# Allegro board AGET_ERNI2HRS.brd
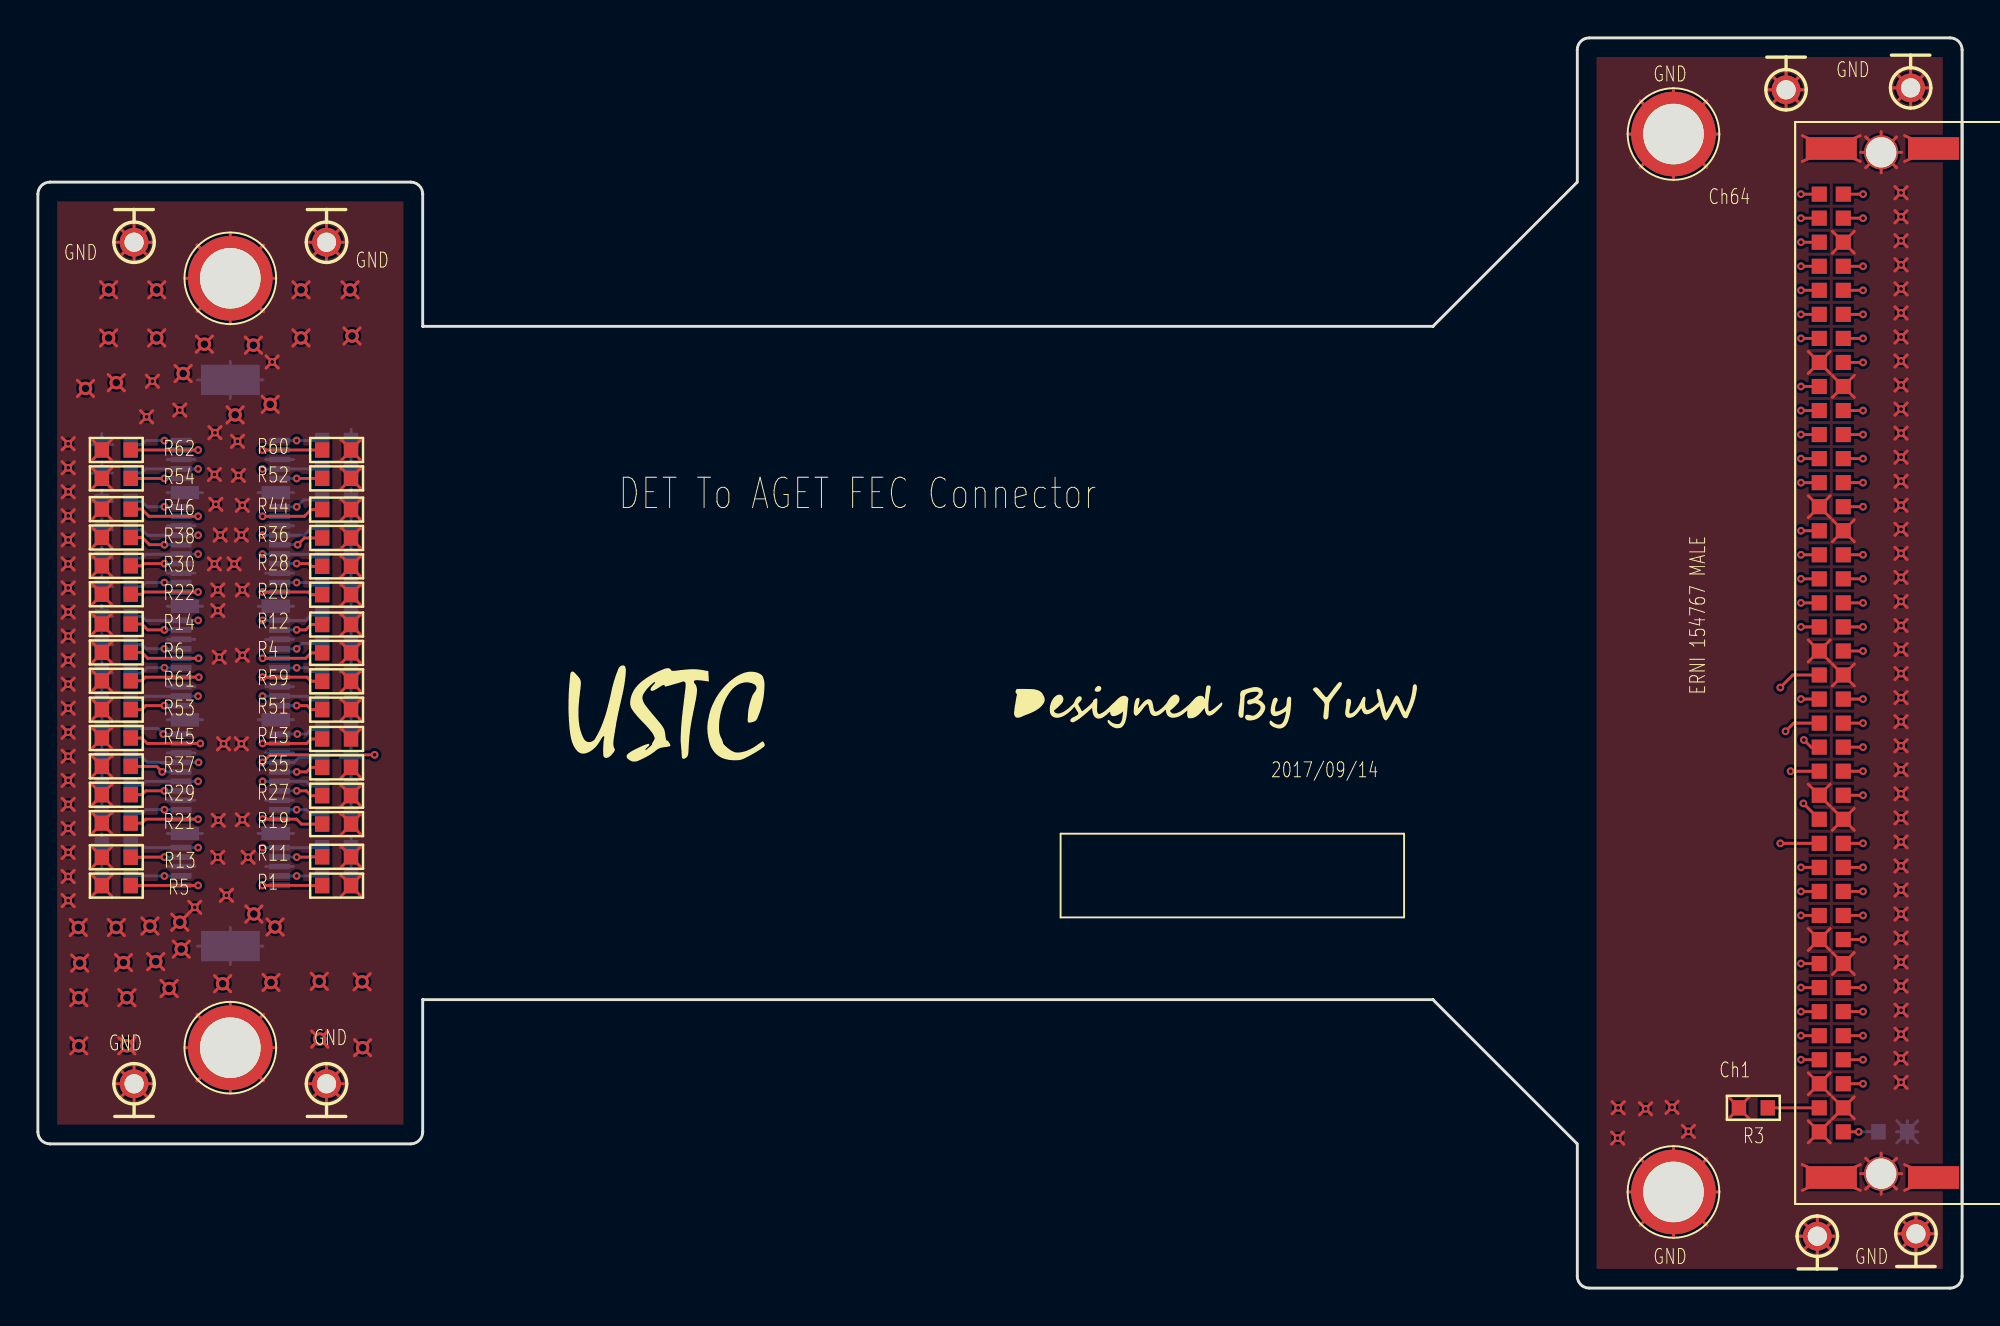
[diagram p0: board, top side]
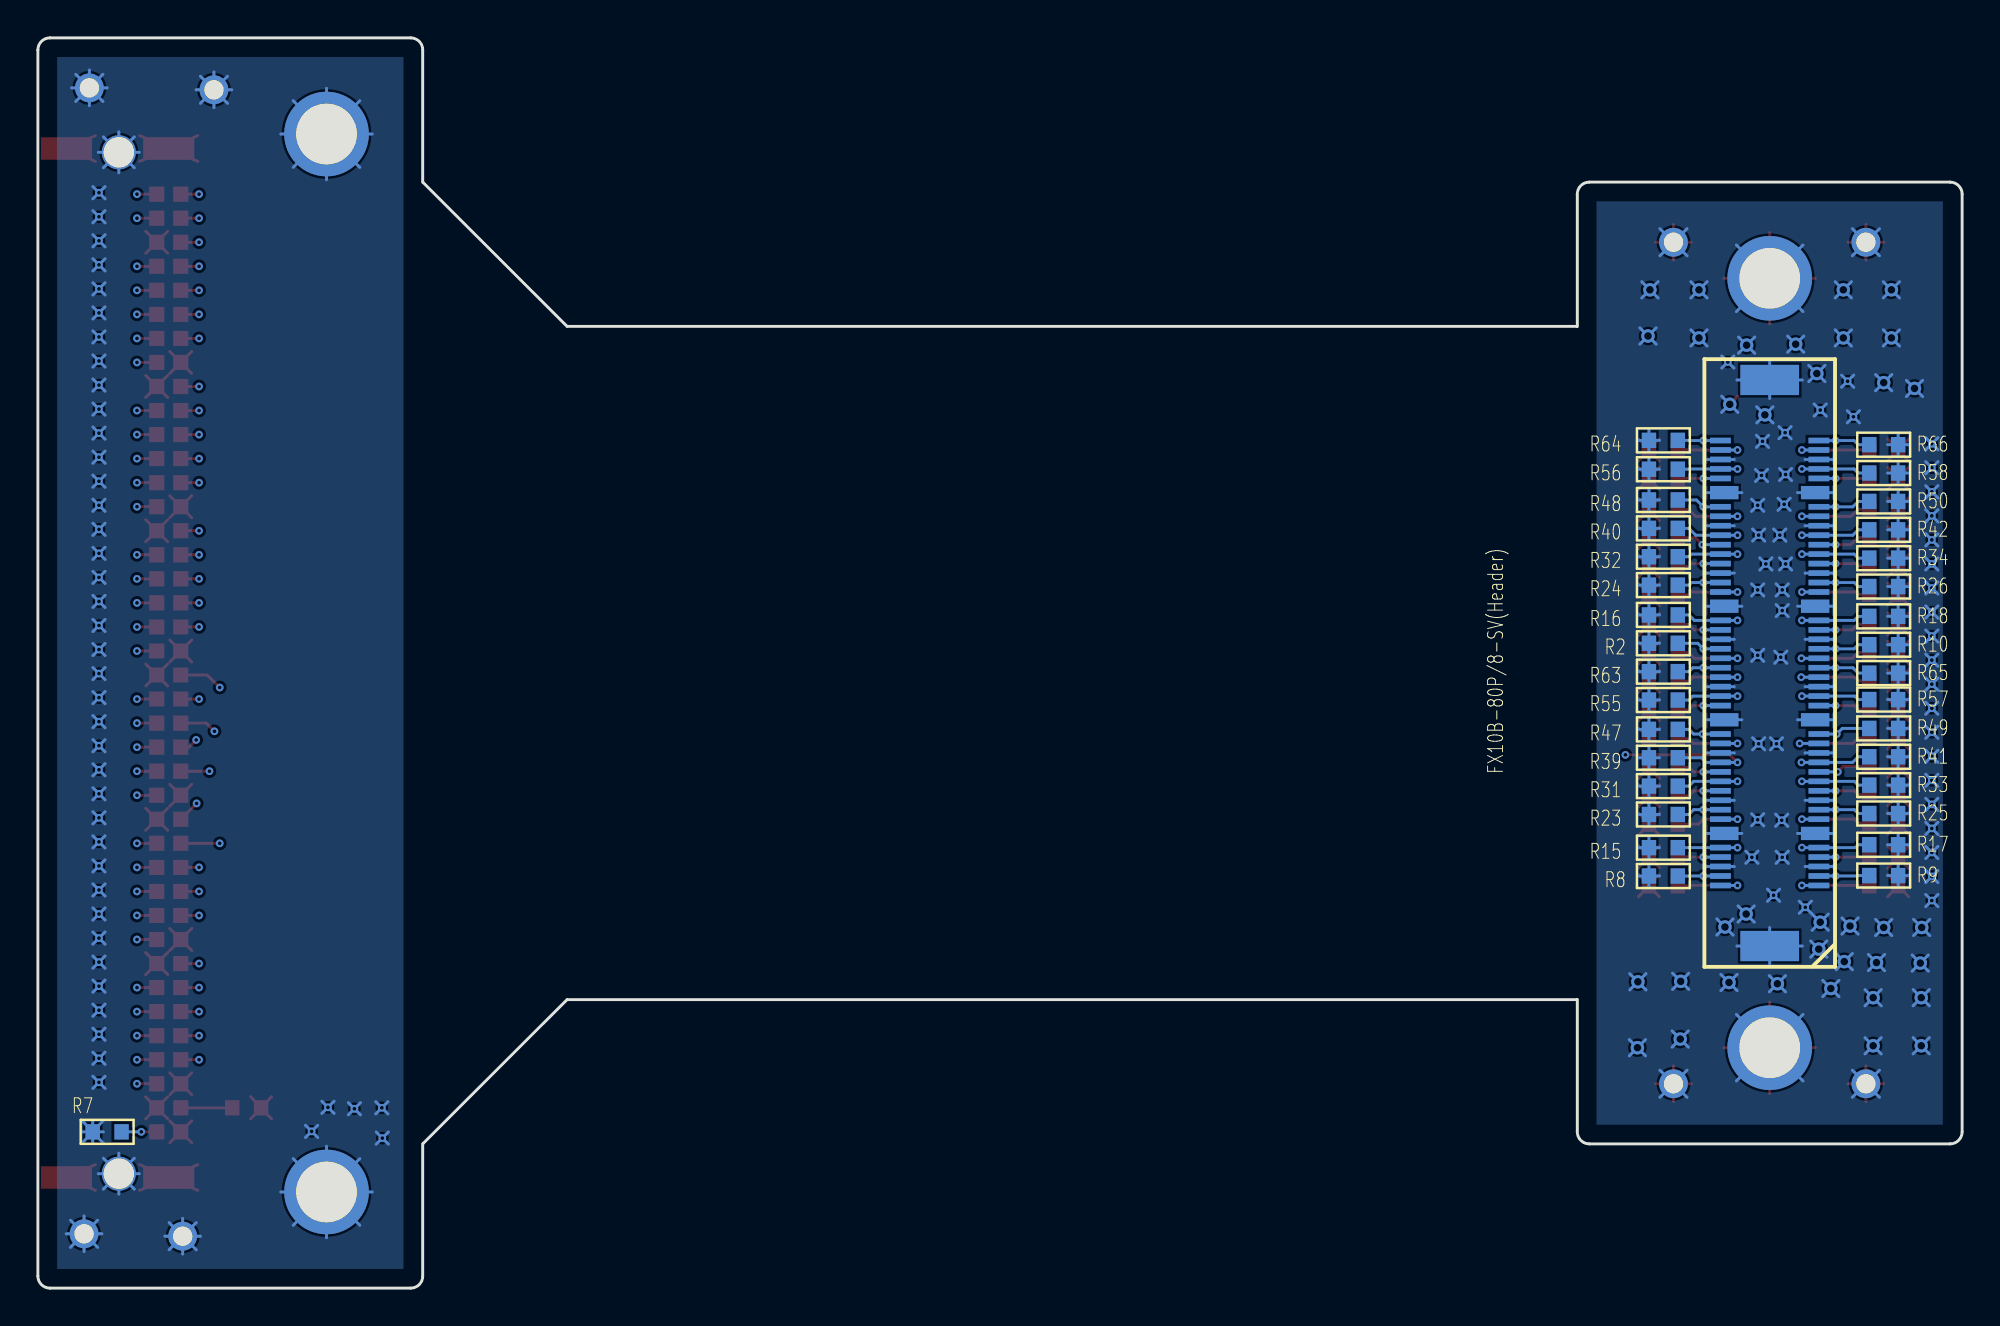
[diagram p1: board, bottom side, seen from below]

Outline 101.6 x 66.04 mm; copper layers: TOP, SIG1, GND, GND1, SIG2, BOTTOM. Coordinates in mm from the lower left corner of the outline.
Outline path: 0,57.78 0,8.26 arc(0.19,7.81) 0.64,7.62 19.68,7.62 arc(20.13,7.81) 20.32,8.26 20.32,15.24 73.66,15.24 81.28,7.62 81.28,0.64 arc(81.47,0.19) 81.92,0 100.97,0 arc(101.41,0.19) 101.6,0.64 101.6,65.41 arc(101.41,65.85) 100.97,66.04 81.92,66.04 arc(81.47,65.85) 81.28,65.41 81.28,58.42 73.66,50.8 20.32,50.8 20.32,57.78 arc(20.13,58.23) 19.68,58.42 0.64,58.42 arc(0.19,58.23) 0,57.78

## Placement (name value [footprint] x y rotation side)
J1  CONN  [ERNI154744FEMALECONNECTOR]  95.33 57.78 0 top
M1  MECH_HOLE_3MM  [MECH_HOLE_3_2MM_PLATED]  10.16 53.34 0 top
M2  MECH_HOLE_3MM  [MECH_HOLE_3_2MM_PLATED]  10.16 12.7 0 top
M3  MECH_HOLE_3MM  [MECH_HOLE_3_2MM_PLATED]  86.36 60.96 0 top
M4  MECH_HOLE_3MM  [MECH_HOLE_3_2MM_PLATED]  86.36 5.08 0 top
NOREF  -  []  26.65 26.74 0 top
NOREF#2  -  []  101.6 0 90 top
NOREF#3  -  []  81.28 0 0 top
NOREF#4  -  []  0 58.42 0 top
NOREF#5  -  []  0 7.62 90 top
NOREF#6  -  []  73.66 15.24 315 top
NOREF#7  -  []  50.26 24.91 0 top
NOREF#8  -  []  20.32 50.8 0 top
NOREF#9  -  []  139.98 62.15 0 top
NOREF#10  -  []  91.64 75.39 0 top
NOREF#11  -  []  5.66 77.11 0 top
NOREF#12  -  []  20.12 -8.81 0 top
R1  1M  [SR0603]  15.77 21.26 0 top
R2  1M  [SR0603]  15.77 34.06 0 bottom
R3  x  [SR0603]  90.58 9.53 180 top
R4  1M  [SR0603]  15.77 33.55 0 top
R5  1M  [SR0603]  4.14 21.26 180 top
R6  1M  [SR0603]  4.14 33.58 180 top
R7  x  [SR0603]  97.94 8.26 180 bottom
R8  1M  [SR0603]  15.77 21.77 0 bottom
R9  1M  [SR0603]  4.14 21.79 180 bottom
R10  1M  [SR0603]  4.14 33.99 180 bottom
R11  1M  [SR0603]  15.77 22.78 0 top
R12  1M  [SR0603]  15.77 35.05 0 top
R13  1M  [SR0603]  4.14 22.76 180 top
R14  1M  [SR0603]  4.14 35.08 180 top
R15  1M  [SR0603]  15.77 23.27 0 bottom
R16  1M  [SR0603]  15.77 35.56 0 bottom
R17  1M  [SR0603]  4.14 23.42 180 bottom
R18  1M  [SR0603]  4.14 35.48 180 bottom
R19  1M  [SR0603]  15.77 24.51 0 top
R20  1M  [SR0603]  15.77 36.63 0 top
R21  1M  [SR0603]  4.14 24.56 180 top
R22  1M  [SR0603]  4.14 36.65 180 top
R23  1M  [SR0603]  15.77 25.02 0 bottom
R24  1M  [SR0603]  15.77 37.13 0 bottom
R25  1M  [SR0603]  4.14 25.07 180 bottom
R26  1M  [SR0603]  4.14 37.06 180 bottom
R27  1M  [SR0603]  15.77 26.01 0 top
R28  1M  [SR0603]  15.77 38.13 0 top
R29  1M  [SR0603]  4.14 26.06 180 top
R30  1M  [SR0603]  4.14 38.15 180 top
R31  1M  [SR0603]  15.77 26.52 0 bottom
R32  1M  [SR0603]  15.77 38.63 0 bottom
R33  1M  [SR0603]  4.14 26.57 180 bottom
R34  1M  [SR0603]  4.14 38.56 180 bottom
R35  1M  [SR0603]  15.77 27.51 0 top
R36  1M  [SR0603]  15.77 39.62 0 top
R37  1M  [SR0603]  4.14 27.56 180 top
R38  1M  [SR0603]  4.14 39.65 180 top
R39  1M  [SR0603]  15.77 28.02 0 bottom
R40  1M  [SR0603]  15.77 40.13 0 bottom
R41  1M  [SR0603]  4.14 28.07 180 bottom
R42  1M  [SR0603]  4.14 40.06 180 bottom
R43  1M  [SR0603]  15.77 29.01 0 top
R44  1M  [SR0603]  15.77 41.12 0 top
R45  1M  [SR0603]  4.14 29.06 180 top
R46  1M  [SR0603]  4.14 41.15 180 top
R47  1M  [SR0603]  15.77 29.51 0 bottom
R48  1M  [SR0603]  15.77 41.63 0 bottom
R49  1M  [SR0603]  4.14 29.57 180 bottom
R50  1M  [SR0603]  4.14 41.55 180 bottom
R51  1M  [SR0603]  15.77 30.56 0 top
R52  1M  [SR0603]  15.77 42.77 0 top
R53  1M  [SR0603]  4.14 30.56 180 top
R54  1M  [SR0603]  4.14 42.77 180 top
R55  1M  [SR0603]  15.77 31.06 0 bottom
R56  1M  [SR0603]  15.77 43.26 0 bottom
R57  1M  [SR0603]  4.14 31.09 180 bottom
R58  1M  [SR0603]  4.14 43.05 180 bottom
R59  1M  [SR0603]  15.77 32.05 0 top
R60  1M  [SR0603]  15.77 44.27 0 top
R61  1M  [SR0603]  4.14 32.08 180 top
R62  1M  [SR0603]  4.14 44.27 180 top
R63  1M  [SR0603]  15.77 32.56 0 bottom
R64  1M  [SR0603]  15.77 44.78 0 bottom
R65  1M  [SR0603]  4.14 32.49 180 bottom
R66  1M  [SR0603]  4.14 44.55 180 bottom
TP1  GND  [TP_40MIL]  92.3 63.3 0 top
TP2  GND  [TP_40MIL]  5.08 10.79 180 top
TP3  GND  [TP_40MIL]  15.24 10.79 180 top
TP4  GND  [TP_40MIL]  5.08 55.24 0 top
TP5  GND  [TP_40MIL]  15.24 55.24 0 top
TP6  GND  [TP_40MIL]  98.88 63.4 0 top
TP7  GND  [TP_40MIL]  93.95 2.74 180 top
TP8  GND  [TP_40MIL]  99.16 2.87 180 top
U1  FX10B-80S8-SV-Header  [FX10B-80P8-SV-HEADER]  7.01 17.27 90 bottom

## Library data of the parts
J1 = CONN_1
M1-M4 = MECH_HOLE_3MM_Plated
R1 R2 R4-R6 R8-R66 = Resistor
R3 R7 = R
TP1-TP8 = T POINT A
U1 = FX10B-80S8-SV-Header

## Footprints (pads in the part's own frame, mm; a bottom-side part is the same pattern mirrored in y, then rotated)
ERNI154744FEMALECONNECTOR
  rect 2.7x1.199 smd: 1(-0.635,2.41) 2(4.765,2.41) 3(-0.635,-51.94) 4(4.765,-51.94)
  round 1.801 hole 1.6: 5(1.999,2.21) 6(1.999,-51.74)
  rect 0.8x0.8 smd: A1(0,-49.53) A2(0,-48.26) A3(0,-46.99) A4(0,-45.72) A5(0,-44.45) A6(0,-43.18) A7(0,-41.91) A8(0,-40.64) A9(0,-39.37) A10(0,-38.1) A11(0,-36.83) A12(0,-35.56) A13(0,-34.29) A14(0,-33.02) A15(0,-31.75) A16(0,-30.48) A17(0,-29.21) A18(0,-27.94) A19(0,-26.67) A20(0,-25.4) A21(0,-24.13) A22(0,-22.86) A23(0,-21.59) A24(0,-20.32) A25(0,-19.05) A26(0,-17.78) A27(0,-16.51) A28(0,-15.24) A29(0,-13.97) A30(0,-12.7) A31(0,-11.43) A32(0,-10.16) A33(0,-8.89) A34(0,-7.62) A35(0,-6.35) A36(0,-5.08) A37(0,-3.81) A38(0,-2.54) A39(0,-1.27) A40(0,0) B1(-1.27,-49.53) B2(-1.27,-48.26) B3(-1.27,-46.99) B4(-1.27,-45.72) B5(-1.27,-44.45) B6(-1.27,-43.18) B7(-1.27,-41.91) B8(-1.27,-40.64) B9(-1.27,-39.37) B10(-1.27,-38.1) B11(-1.27,-36.83) B12(-1.27,-35.56) B13(-1.27,-34.29) B14(-1.27,-33.02) B15(-1.27,-31.75) B16(-1.27,-30.48) B17(-1.27,-29.21) B18(-1.27,-27.94) B19(-1.27,-26.67) B20(-1.27,-25.4) B21(-1.27,-24.13) B22(-1.27,-22.86) B23(-1.27,-21.59) B24(-1.27,-20.32) B25(-1.27,-19.05) B26(-1.27,-17.78) B27(-1.27,-16.51) B28(-1.27,-15.24) B29(-1.27,-13.97) B30(-1.27,-12.7) B31(-1.27,-11.43) B32(-1.27,-10.16) B33(-1.27,-8.89) B34(-1.27,-7.62) B35(-1.27,-6.35) B36(-1.27,-5.08) B37(-1.27,-3.81) B38(-1.27,-2.54) B39(-1.27,-1.27) B40(-1.27,0)
FX10B-80P8-SV-HEADER
  rect 0.3x1.1 smd: 1(4,5.751) 2(4,0.551) 3(4.501,5.751) 4(4.501,0.551) 5(5.001,5.751) 6(5.001,0.551) 7(5.499,5.751) 8(5.499,0.551) 9(5.999,5.751) 10(5.999,0.551) 13(7.501,5.751) 14(7.501,0.551) 15(8.001,5.751) 16(8.001,0.551) 17(8.499,5.751) 18(8.499,0.551) 19(8.999,5.751) 20(8.999,0.551) 21(9.5,5.751) 22(9.5,0.551) 23(10,5.751) 24(10,0.551) 25(10.5,5.751) 26(10.5,0.551) 27(11.001,5.751) 28(11.001,0.551) 29(11.501,5.751) 30(11.501,0.551) 31(11.999,5.751) 32(11.999,0.551) 35(13.5,5.751) 36(13.5,0.551) 37(14,5.751) 38(14,0.551) 39(14.501,5.751) 40(14.501,0.551) 41(15.001,5.751) 42(15.001,0.551) 43(15.499,5.751) 44(15.499,0.551) 45(15.999,5.751) 46(15.999,0.551) 47(16.5,5.751) 48(16.5,0.551) 49(17,5.751) 50(17,0.551) 51(17.501,5.751) 52(17.501,0.551) 53(18.001,5.751) 54(18.001,0.551) 57(19.5,5.751) 58(19.5,0.551) 59(20,5.751) 60(20,0.551) 61(20.5,5.751) 62(20.5,0.551) 63(21.001,5.751) 64(21.001,0.551) 65(21.501,5.751) 66(21.501,0.551) 67(21.999,5.751) 68(21.999,0.551) 69(22.499,5.751) 70(22.499,0.551) 71(23,5.751) 72(23,0.551) 73(23.5,5.751) 74(23.5,0.551) 75(24,5.751) 76(24,0.551) 79(25.499,5.751) 80(25.499,0.551) 81(25.999,5.751) 82(25.999,0.551) 83(26.5,5.751) 84(26.5,0.551) 85(27,5.751) 86(27,0.551) 87(27.501,5.751) 88(27.501,0.551)
  rect 0.701x1.501 smd: 11(6.749,5.55) 12(6.749,0.749) 33(12.751,5.55) 34(12.751,0.749) 55(18.75,5.55) 56(18.75,0.749) 77(24.75,5.55) 78(24.75,0.749)
  rect 1.6x3.099 smd: B1(0.8,3.15) B2(30.701,3.15)
MECH_HOLE_3_2MM_PLATED
  round 4.47 hole 3.2: 1(0,0)
SR0603
  rect 0.762x0.813 smd: 1(-0.762,0) 2(0.762,0)
TP_40MIL
  round 1.524 hole 1.016: 1(0,0)

## Nets
GND: J1.1(GND#1) J1.2(GND#2) J1.3(GND#3) J1.4(GND#4) J1.5(GND#5) J1.6(GND#6) J1.A2 J1.A8 J1.A14 J1.A20 J1.A26 J1.A32 J1.A38 J1.B1 J1.B3 J1.B9 J1.B15 J1.B21 J1.B27 J1.B33 M1.1(HOLE) M2.1(HOLE) M3.1(HOLE) M4.1(HOLE) R1.2 R2.2 R3.2 R4.2 R5.2 R6.2 R7.1 R8.2 R9.2 R10.2 R11.2 R12.2 R13.2 R14.2 R15.2 R16.2 R17.2 R18.2 R19.2 R20.2 R21.2 R22.2 R23.2 R24.2 R25.2 R26.2 R27.2 R28.2 R29.2 R30.2 R31.2 R32.2 R33.2 R34.2 R35.2 R36.2 R37.2 R38.2 R39.2 R40.2 R41.2 R42.2 R43.2 R44.2 R45.2 R46.2 R47.2 R48.2 R49.2 R50.2 R51.2 R52.2 R53.2 R54.2 R55.2 R56.2 R57.2 R58.2 R59.2 R60.2 R61.2 R62.2 R63.2 R64.2 R65.2 R66.2 TP1.1(TP) TP2.1(TP) TP3.1(TP) TP4.1(TP) TP5.1(TP) TP6.1(TP) TP7.1(TP) TP8.1(TP) U1.5 U1.6 U1.11(GND1) U1.12(GND1-1) U1.17 U1.18 U1.27 U1.28 U1.33(GND2) U1.34(GND2-2) U1.39 U1.40 U1.49 U1.50 U1.55(GND3) U1.56(GND3-3) U1.61 U1.62 U1.71 U1.72 U1.77(GND4) U1.78(GND4-4) U1.83 U1.84 U1.B1(PAD1) U1.B2(PAD2)
INA_01: J1.A3 R1.1 U1.1
INA_02: J1.B4 R5.1 U1.2
INA_03: J1.A4 R8.1 U1.3
INA_04: J1.B5 R9.1 U1.4
INA_05: J1.A5 R11.1 U1.7
INA_06: J1.B6 R13.1 U1.8
INA_07: J1.A6 R15.1 U1.9
INA_08: J1.B7 R17.1 U1.10
INA_09: J1.A7 R19.1 U1.13
INA_10: J1.B8 R21.1 U1.14
INA_11: J1.A9 R23.1 U1.15
INA_12: J1.B10 R25.1 U1.16
INA_13: J1.A10 R27.1 U1.19
INA_14: J1.B11 R29.1 U1.20
INA_15: J1.A11 R31.1 U1.21
INA_16: J1.B12 R33.1 U1.22
INA_17: J1.A12 R35.1 U1.23
INA_18: J1.B13 R37.1 U1.24
INA_19: J1.A13 R39.1 U1.25
INA_20: J1.B14 R41.1 U1.26
INA_21: J1.A15 R43.1 U1.29
INA_22: J1.B16 R45.1 U1.30
INA_23: J1.A16 R47.1 U1.31
INA_24: J1.B17 R49.1 U1.32
INA_25: J1.A17 R51.1 U1.35
INA_26: J1.B18 R53.1 U1.36
INA_27: J1.A18 R55.1 U1.37
INA_28: J1.B19 R57.1 U1.38
INA_29: J1.A19 R59.1 U1.41
INA_30: J1.B20 R61.1 U1.42
INA_31: J1.A21 R63.1 U1.43
INA_32: J1.B22 R65.1 U1.44
INA_33: J1.A22 R4.1 U1.45
INA_34: J1.B23 R6.1 U1.46
INA_35: J1.A23 R2.1 U1.47
INA_36: J1.B24 R10.1 U1.48
INA_37: J1.A24 R12.1 U1.51
INA_38: J1.B25 R14.1 U1.52
INA_39: J1.A25 R16.1 U1.53
INA_40: J1.B26 R18.1 U1.54
INA_41: J1.A27 R20.1 U1.57
INA_42: J1.B28 R22.1 U1.58
INA_43: J1.A28 R24.1 U1.59
INA_44: J1.B29 R26.1 U1.60
INA_45: J1.A29 R28.1 U1.63
INA_46: J1.B30 R30.1 U1.64
INA_47: J1.A30 R32.1 U1.65
INA_48: J1.B31 R34.1 U1.66
INA_49: J1.A31 R36.1 U1.67
INA_50: J1.B32 R38.1 U1.68
INA_51: J1.A33 R40.1 U1.69
INA_52: J1.B34 R42.1 U1.70
INA_53: J1.A34 R44.1 U1.73
INA_54: J1.B35 R46.1 U1.74
INA_55: J1.A35 R48.1 U1.75
INA_56: J1.B36 R50.1 U1.76
INA_57: J1.A36 R52.1 U1.79
INA_58: J1.B37 R54.1 U1.80
INA_59: J1.A37 R56.1 U1.81
INA_60: J1.B38 R58.1 U1.82
INA_61: J1.A39 R60.1 U1.85
INA_62: J1.B39 R62.1 U1.86
INA_63: J1.A40 R64.1 U1.87
INA_64: J1.B40 R66.1 U1.88
N01819: J1.A1 R7.2
N01997: J1.B2 R3.1

## Via types
v1: diameter 0.406, hole 0.203, TOP to BOTTOM, 220 vias
v2: diameter 0.711, hole 0.406, TOP to BOTTOM, 36 vias

## Routing (per net, layer and track width the routed paths; a pad name or vN(x,y) marks a point on that pad's centre or on a via; arc(x,y) is an arc through that point)
GND: length 1082.6
  TOP w0.152: v1(9.53,24.71) 9.85,24.39 ; v1(9.53,24.71) 9.2,25.04 ; v1(9.53,24.71) 9.85,25.04 ; v1(9.53,24.71) 9.2,24.39 ; 5.08,9.85 TP2.1 ; TP2.1 5.8,10.08 ; TP2.1 6.02,10.79 ; TP2.1 4.14,10.79 ; TP2.1 5.8,11.51 ; TP2.1 4.36,11.51 ; TP2.1 5.08,11.74 ; TP2.1 4.36,10.08 ; v2(2.51,47.52) 2.94,47.95 ; v2(2.51,47.52) 2.09,47.09 ; v2(2.51,47.52) 2.09,47.95 ; v2(2.51,47.52) 2.94,47.09 ; 9.18,35.47 v1(9.5,35.79) ; v1(9.5,35.79) 9.18,36.11 ; v1(9.5,35.79) 9.82,35.47 ; v1(9.5,35.79) 9.82,36.11 ; v1(9.35,45.19) 9.67,45.51 ; v1(9.35,45.19) 9.02,45.51 ; v1(9.35,45.19) 9.02,44.86 ; v1(9.35,45.19) 9.67,44.86 ; TP3.1 16.18,10.79 ; TP3.1 14.52,10.08 ; TP3.1 14.3,10.79 ; TP3.1 15.96,10.08 ; TP3.1 14.52,11.51 ; TP3.1 15.24,9.85 ; TP3.1 15.24,11.74 ; TP3.1 15.96,11.51 ; v1(1.6,38.25) 1.92,38.57 ; v1(1.6,38.25) 1.28,37.93 ; v1(1.6,38.25) 1.28,38.57 ; v1(1.6,38.25) 1.92,37.93 ; M3.1 88.78,60.96 ; M3.1 84.6,59.2 ; M3.1 88.12,59.2 ; M3.1 86.36,63.38 ; M3.1 84.6,62.72 ; M3.1 86.36,58.54 ; M3.1 83.94,60.96 ; M3.1 88.12,62.72 ; R4.2 17.09,34.14 ; R4.2 17.09,32.97 ; R4.2 15.98,34.14 ; R4.2 15.98,32.97 ; 94.74,31.8 J1.A20 ; J1.A20 94.74,32.97 ; J1.A20 95.91,31.8 ; J1.A20 95.91,32.97 ; 98.17,64.11 TP6.1 ; TP6.1 98.17,62.68 ; TP6.1 99.6,64.11 ; TP6.1 99.6,62.68 ; TP6.1 99.82,63.4 ; TP6.1 98.88,64.34 ; TP6.1 98.88,62.46 ; TP6.1 97.94,63.4 ; J1.6 98.41,6.05 ; J1.6 97.33,7.13 ; J1.6 96.51,5.23 ; J1.6 97.33,4.96 ; J1.6 98.14,6.86 ; J1.6 98.14,5.23 ; J1.6 96.51,6.86 ; J1.6 96.24,6.05 ; 93.24,2.03 TP7.1 ; TP7.1 94.67,2.03 ; TP7.1 94.9,2.74 ; TP7.1 93.01,2.74 ; TP7.1 94.67,3.46 ; TP7.1 93.95,1.8 ; TP7.1 93.24,3.46 ; TP7.1 93.95,3.69 ; R53.2 3.93,29.97 ; R53.2 3.93,31.14 ; R53.2 2.83,29.97 ; R53.2 2.83,31.14 ; v1(98.37,41.35) 98.7,41.03 ; v1(98.37,41.35) 98.05,41.67 ; v1(98.37,41.35) 98.7,41.67 ; v1(98.37,41.35) 98.05,41.03 ; v1(1.6,42.06) 1.92,41.74 ; v1(1.6,42.06) 1.92,42.38 ; v1(1.6,42.06) 1.28,42.38 ; v1(1.6,42.06) 1.28,41.74 ; 96.24,59.99 J1.5 ; J1.5 98.14,60.81 ; J1.5 97.33,61.08 ; J1.5 96.51,59.18 ; J1.5 97.33,58.91 ; J1.5 98.41,59.99 ; J1.5 96.51,60.81 ; J1.5 98.14,59.18 ; 10.47,33.75 v1(10.79,33.43) ; v1(10.79,33.43) 10.47,33.1 ; v1(10.79,33.43) 11.12,33.1 ; v1(10.79,33.43) 11.12,33.75 ; v1(1.6,34.44) 1.92,34.76 ; v1(1.6,34.44) 1.28,34.12 ; v1(1.6,34.44) 1.92,34.12 ; v1(1.6,34.44) 1.28,34.76 ; 7.96,19.79 v1(8.28,20.12) ; v1(8.28,20.12) 7.96,20.44 ; v1(8.28,20.12) 8.6,20.44 ; v1(8.28,20.12) 8.6,19.79 ; 84.56,9.8 v1(84.89,9.47) ; v1(84.89,9.47) 84.56,9.15 ; v1(84.89,9.47) 85.21,9.8 ; v1(84.89,9.47) 85.21,9.15 ; 3.71,48.26 v2(4.14,47.83) ; v2(4.14,47.83) 4.57,47.4 ; v2(4.14,47.83) 3.71,47.4 ; v2(4.14,47.83) 4.57,48.26 ; v2(3.73,50.19) 4.16,49.76 ; v2(3.73,50.19) 3.3,50.62 ; v2(3.73,50.19) 4.16,50.62 ; v2(3.73,50.19) 3.3,49.76 ; 1.28,27.14 v1(1.6,26.82) ; v1(1.6,26.82) 1.92,27.14 ; v1(1.6,26.82) 1.28,26.5 ; v1(1.6,26.82) 1.92,26.5 ; 4.27,14.91 v2(4.7,15.34) ; v2(4.7,15.34) 4.27,15.77 ; v2(4.7,15.34) 5.13,15.77 ; v2(4.7,15.34) 5.13,14.91 ; v1(98.37,37.54) 98.7,37.86 ; v1(98.37,37.54) 98.05,37.86 ; v1(98.37,37.54) 98.05,37.22 ; v1(98.37,37.54) 98.7,37.22 ; 14.43,15.78 v2(14.86,16.21) ; v2(14.86,16.21) 15.29,15.78 ; v2(14.86,16.21) 15.29,16.63 ; v2(14.86,16.21) 14.43,16.63 ; v2(6.22,17.25) 6.65,17.68 ; v2(6.22,17.25) 5.79,17.68 ; v2(6.22,17.25) 5.79,16.82 ; v2(6.22,17.25) 6.65,16.82 ; 15.98,36.04 R20.2 ; R20.2 17.09,37.21 ; R20.2 17.09,36.04 ; R20.2 15.98,37.21 ; v1(98.37,52.78) 98.7,52.46 ; v1(98.37,52.78) 98.05,53.1 ; v1(98.37,52.78) 98.05,52.46 ; v1(98.37,52.78) 98.7,53.1 ; 1.28,32.22 v1(1.6,31.9) ; v1(1.6,31.9) 1.92,32.22 ; v1(1.6,31.9) 1.92,31.58 ; v1(1.6,31.9) 1.28,31.58 ; 2.83,37.24 R22.2 ; R22.2 3.93,36.07 ; R22.2 2.83,36.07 ; R22.2 3.93,37.24 ; v1(9.8,28.75) 10.13,29.08 ; v1(9.8,28.75) 9.48,29.08 ; v1(9.8,28.75) 10.13,28.43 ; v1(9.8,28.75) 9.48,28.43 ; v1(1.6,24.28) 1.92,23.96 ; v1(1.6,24.28) 1.92,24.6 ; v1(1.6,24.28) 1.28,23.96 ; v1(1.6,24.28) 1.28,24.6 ; 15.98,37.54 R28.2 ; R28.2 15.98,38.71 ; R28.2 17.09,38.71 ; R28.2 17.09,37.54 ; v1(10.79,41.35) 11.12,41.67 ; v1(10.79,41.35) 10.47,41.67 ; v1(10.79,41.35) 10.47,41.03 ; v1(10.79,41.35) 11.12,41.03 ; TP1.1 93.02,62.58 ; TP1.1 91.59,64.01 ; TP1.1 92.3,62.35 ; TP1.1 93.02,64.01 ; TP1.1 91.59,62.58 ; TP1.1 91.36,63.3 ; TP1.1 92.3,64.24 ; TP1.1 93.25,63.3 ; 15.98,31.47 R59.2 ; R59.2 17.09,32.64 ; R59.2 17.09,31.47 ; R59.2 15.98,32.64 ; v1(98.37,35) 98.7,35.32 ; v1(98.37,35) 98.05,35.32 ; v1(98.37,35) 98.7,34.68 ; v1(98.37,35) 98.05,34.68 ; TP5.1 16.18,55.24 ; TP5.1 15.96,54.53 ; TP5.1 15.96,55.96 ; TP5.1 14.52,54.53 ; TP5.1 14.3,55.24 ; TP5.1 15.24,56.19 ; TP5.1 14.52,55.96 ; TP5.1 15.24,54.3 ; v1(98.37,42.62) 98.7,42.3 ; v1(98.37,42.62) 98.05,42.94 ; v1(98.37,42.62) 98.05,42.3 ; v1(98.37,42.62) 98.7,42.94 ; v1(10.59,42.93) 10.91,42.6 ; v1(10.59,42.93) 10.27,43.25 ; v1(10.59,42.93) 10.27,42.6 ; v1(10.59,42.93) 10.91,43.25 ; 2.83,44.86 R62.2 ; R62.2 3.93,44.86 ; R62.2 3.93,43.69 ; R62.2 2.83,43.69 ; v1(86.28,9.55) 86.61,9.23 ; v1(86.28,9.55) 86.61,9.87 ; v1(86.28,9.55) 85.96,9.23 ; v1(86.28,9.55) 85.96,9.87 ; 94.06,41.27 94.64,40.69 ; 94.06,41.27 93.47,41.86 ; 94.06,41.27 94.64,41.86 ; 94.06,41.27 93.47,40.69 ; v1(98.37,22.3) 98.7,21.98 ; v1(98.37,22.3) 98.7,22.62 ; v1(98.37,22.3) 98.05,22.62 ; v1(98.37,22.3) 98.05,21.98 ; v2(7.67,48.31) 8.1,48.74 ; v2(7.67,48.31) 7.24,48.74 ; v2(7.67,48.31) 7.24,47.88 ; v2(7.67,48.31) 8.1,47.88 ; v1(1.6,43.33) 1.92,43.65 ; v1(1.6,43.33) 1.92,43.01 ; v1(1.6,43.33) 1.28,43.65 ; v1(1.6,43.33) 1.28,43.01 ; 14.46,12.73 v2(14.88,13.16) ; v2(14.88,13.16) 14.46,13.59 ; v2(14.88,13.16) 15.31,12.73 ; v2(14.88,13.16) 15.31,13.59 ; 1.73,12.37 v2(2.16,12.8) ; v2(2.16,12.8) 2.59,13.23 ; v2(2.16,12.8) 2.59,12.37 ; v2(2.16,12.8) 1.73,13.23 ; v1(98.37,51.51) 98.7,51.19 ; v1(98.37,51.51) 98.05,51.19 ; v1(98.37,51.51) 98.7,51.83 ; v1(98.37,51.51) 98.05,51.83 ; 2.83,28.47 R45.2 ; R45.2 3.93,29.64 ; R45.2 2.83,29.64 ; R45.2 3.93,28.47 ; 98.05,32.78 v1(98.37,32.46) ; v1(98.37,32.46) 98.05,32.14 ; v1(98.37,32.46) 98.7,32.14 ; v1(98.37,32.46) 98.7,32.78 ; v1(1.6,40.79) 1.92,41.11 ; v1(1.6,40.79) 1.92,40.47 ; v1(1.6,40.79) 1.28,40.47 ; v1(1.6,40.79) 1.28,41.11 ; 10.47,36.56 v1(10.79,36.88) ; v1(10.79,36.88) 10.47,37.2 ; v1(10.79,36.88) 11.12,37.2 ; v1(10.79,36.88) 11.12,36.56 ; v1(10.74,39.78) 11.07,39.45 ; v1(10.74,39.78) 10.42,40.1 ; v1(10.74,39.78) 10.42,39.45 ; v1(10.74,39.78) 11.07,40.1 ; 98.05,48.02 v1(98.37,47.7) ; v1(98.37,47.7) 98.7,47.38 ; v1(98.37,47.7) 98.7,48.02 ; v1(98.37,47.7) 98.05,47.38 ; v1(10.79,24.74) 11.12,24.42 ; v1(10.79,24.74) 11.12,25.06 ; v1(10.79,24.74) 10.47,24.42 ; v1(10.79,24.74) 10.47,25.06 ; v1(10.36,38.25) 10.69,37.93 ; v1(10.36,38.25) 10.69,38.57 ; v1(10.36,38.25) 10.04,38.57 ; v1(10.36,38.25) 10.04,37.93 ; 98.05,27.06 v1(98.37,27.38) ; v1(98.37,27.38) 98.7,27.7 ; v1(98.37,27.38) 98.7,27.06 ; v1(98.37,27.38) 98.05,27.7 ; v1(98.37,14.68) 98.7,15 ; v1(98.37,14.68) 98.05,14.36 ; v1(98.37,14.68) 98.7,14.36 ; v1(98.37,14.68) 98.05,15 ; 5.42,45.7 v1(5.74,46.02) ; v1(5.74,46.02) 6.06,45.7 ; v1(5.74,46.02) 5.42,46.35 ; v1(5.74,46.02) 6.06,46.35 ; 15.98,25.1 R19.2 ; R19.2 17.09,25.1 ; R19.2 15.98,23.92 ; R19.2 17.09,23.92 ; 1.28,32.85 v1(1.6,33.17) ; v1(1.6,33.17) 1.28,33.49 ; v1(1.6,33.17) 1.92,33.49 ; v1(1.6,33.17) 1.92,32.85 ; 3.71,18.62 v2(4.14,19.05) ; v2(4.14,19.05) 4.57,18.62 ; v2(4.14,19.05) 4.57,19.48 ; v2(4.14,19.05) 3.71,19.48 ; 5.84,49.76 v2(6.27,50.19) ; v2(6.27,50.19) 5.84,50.62 ; v2(6.27,50.19) 6.7,49.76 ; v2(6.27,50.19) 6.7,50.62 ; v1(1.6,25.55) 1.92,25.87 ; v1(1.6,25.55) 1.28,25.87 ; v1(1.6,25.55) 1.28,25.23 ; v1(1.6,25.55) 1.92,25.23 ; v1(1.6,39.52) 1.92,39.84 ; v1(1.6,39.52) 1.28,39.2 ; v1(1.6,39.52) 1.92,39.2 ; v1(1.6,39.52) 1.28,39.84 ; v1(98.37,17.22) 98.7,17.54 ; v1(98.37,17.22) 98.05,16.9 ; v1(98.37,17.22) 98.05,17.54 ; v1(98.37,17.22) 98.7,16.9 ; 9.3,40.1 v1(9.63,39.78) ; v1(9.63,39.78) 9.95,39.45 ; v1(9.63,39.78) 9.3,39.45 ; v1(9.63,39.78) 9.95,40.1 ; v1(10.74,28.75) 11.07,28.43 ; v1(10.74,28.75) 10.42,28.43 ; v1(10.74,28.75) 11.07,29.08 ; v1(10.74,28.75) 10.42,29.08 ; M4.1 88.78,5.08 ; M4.1 84.6,6.84 ; M4.1 86.36,2.66 ; M4.1 88.12,6.84 ; M4.1 83.94,5.08 ; M4.1 86.36,7.5 ; M4.1 84.6,3.32 ; M4.1 88.12,3.32 ; 1.28,44.28 v1(1.6,44.6) ; v1(1.6,44.6) 1.92,44.28 ; v1(1.6,44.6) 1.28,44.92 ; v1(1.6,44.6) 1.92,44.92 ; v2(7.57,17.91) 8,17.48 ; v2(7.57,17.91) 7.14,18.34 ; v2(7.57,17.91) 7.14,17.48 ; v2(7.57,17.91) 8,18.34 ; J1.A32 95.91,48.21 ; J1.A32 94.74,48.21 ; J1.A32 94.74,47.04 ; J1.A32 95.91,47.04 ; 6.5,15.4 v2(6.93,15.83) ; v2(6.93,15.83) 7.36,16.26 ; v2(6.93,15.83) 7.36,15.4 ; v2(6.93,15.83) 6.5,16.26 ; v1(6.05,47.9) 6.37,48.23 ; v1(6.05,47.9) 6.37,47.58 ; v1(6.05,47.9) 5.72,47.58 ; v1(6.05,47.9) 5.72,48.23 ; v1(7.49,46.38) 7.82,46.7 ; v1(7.49,46.38) 7.17,46.7 ; v1(7.49,46.38) 7.17,46.06 ; v1(7.49,46.38) 7.82,46.06 ; 10.16,10.28 M2.1 ; M2.1 8.4,10.94 ; M2.1 11.92,10.94 ; M2.1 10.16,15.12 ; M2.1 12.58,12.7 ; M2.1 7.74,12.7 ; M2.1 8.4,14.46 ; M2.1 11.92,14.46 ; v2(4.52,17.2) 4.95,17.63 ; v2(4.52,17.2) 4.95,16.77 ; v2(4.52,17.2) 4.09,16.77 ; v2(4.52,17.2) 4.09,17.63 ; 1.28,27.77 v1(1.6,28.09) ; v1(1.6,28.09) 1.92,27.77 ; v1(1.6,28.09) 1.92,28.41 ; v1(1.6,28.09) 1.28,28.41 ; 83.09,7.6 v1(83.41,7.92) ; v1(83.41,7.92) 83.74,7.6 ; v1(83.41,7.92) 83.09,8.25 ; v1(83.41,7.92) 83.74,8.25 ; v1(1.6,29.36) 1.92,29.04 ; v1(1.6,29.36) 1.28,29.04 ; v1(1.6,29.36) 1.92,29.68 ; v1(1.6,29.36) 1.28,29.68 ; v1(1.6,36.98) 1.92,36.66 ; v1(1.6,36.98) 1.92,37.3 ; v1(1.6,36.98) 1.28,37.3 ; v1(1.6,36.98) 1.28,36.66 ; 4.14,55.24 TP4.1 ; TP4.1 5.08,54.3 ; TP4.1 4.36,55.96 ; TP4.1 4.36,54.53 ; TP4.1 5.08,56.19 ; TP4.1 5.8,55.96 ; TP4.1 5.8,54.53 ; TP4.1 6.02,55.24 ; 2.83,32.99 R6.2 ; R6.2 3.93,32.99 ; R6.2 2.83,34.17 ; R6.2 3.93,34.17 ; 2.83,43.36 R54.2 ; R54.2 3.93,42.19 ; R54.2 3.93,43.36 ; R54.2 2.83,42.19 ; 98.56,59.51 J1.2 98.56,60.88 ; J1.A8 95.91,16.56 ; J1.A8 94.74,16.56 ; J1.A8 95.91,17.73 ; J1.A8 94.74,17.73 ; 98.05,40.4 v1(98.37,40.08) ; v1(98.37,40.08) 98.05,39.76 ; v1(98.37,40.08) 98.7,39.76 ; v1(98.37,40.08) 98.7,40.4 ; 5.84,52.3 v2(6.27,52.73) ; v2(6.27,52.73) 6.7,52.3 ; v2(6.27,52.73) 5.84,53.16 ; v2(6.27,52.73) 6.7,53.16 ; 98.22,2.87 TP8.1 ; TP8.1 98.45,2.15 ; TP8.1 100.1,2.87 ; TP8.1 98.45,3.59 ; TP8.1 99.88,2.15 ; TP8.1 99.16,1.93 ; TP8.1 99.16,3.81 ; TP8.1 99.88,3.59 ; 1.28,21.42 v1(1.6,21.74) ; v1(1.6,21.74) 1.28,22.06 ; v1(1.6,21.74) 1.92,21.42 ; v1(1.6,21.74) 1.92,22.06 ; 9.18,22.44 v1(9.5,22.76) ; v1(9.5,22.76) 9.18,23.08 ; v1(9.5,22.76) 9.82,23.08 ; v1(9.5,22.76) 9.82,22.44 ; v1(1.6,30.63) 1.92,30.31 ; v1(1.6,30.63) 1.92,30.95 ; v1(1.6,30.63) 1.28,30.31 ; v1(1.6,30.63) 1.28,30.95 ; 2.83,21.85 R5.2 ; R5.2 3.93,21.85 ; R5.2 2.83,20.67 ; R5.2 3.93,20.67 ; 98.05,12.46 v1(98.37,12.14) ; v1(98.37,12.14) 98.7,11.82 ; v1(98.37,12.14) 98.7,12.46 ; v1(98.37,12.14) 98.05,11.82 ; 10.22,44.41 v1(10.54,44.73) ; v1(10.54,44.73) 10.86,44.41 ; v1(10.54,44.73) 10.22,45.05 ; v1(10.54,44.73) 10.86,45.05 ; M1.1 11.92,51.58 ; M1.1 10.16,55.76 ; M1.1 10.16,50.92 ; M1.1 8.4,55.1 ; M1.1 8.4,51.58 ; M1.1 7.74,53.34 ; M1.1 11.92,55.1 ; M1.1 12.58,53.34 ; v1(87.15,8.28) 87.47,7.96 ; v1(87.15,8.28) 86.82,8.6 ; v1(87.15,8.28) 86.82,7.96 ; v1(87.15,8.28) 87.47,8.6 ; J1.A14 95.91,24.18 ; J1.A14 95.91,25.35 ; J1.A14 94.74,25.35 ; J1.A14 94.74,24.18 ; 93.47,26.62 94.06,26.04 ; 94.06,26.04 94.64,26.62 ; 94.06,26.04 94.64,25.45 ; 98.05,18.81 v1(98.37,18.49) ; v1(98.37,18.49) 98.05,18.17 ; v1(98.37,18.49) 98.7,18.81 ; v1(98.37,18.49) 98.7,18.17 ; 94.06,48.9 94.64,48.31 ; 94.06,48.9 94.64,49.48 ; 94.06,48.9 93.47,48.31 ; 94.06,48.9 93.47,49.48 ; R3.2 90.37,8.94 ; R3.2 89.26,10.11 ; R3.2 90.37,10.11 ; R3.2 89.26,8.94 ; 93.47,33.07 J1.B21 ; J1.B21 94.64,34.24 ; J1.B21 94.64,33.07 ; J1.B21 93.47,34.24 ; 98.05,19.44 v1(98.37,19.76) ; v1(98.37,19.76) 98.05,20.08 ; v1(98.37,19.76) 98.7,19.44 ; v1(98.37,19.76) 98.7,20.08 ; 8.36,50.29 v2(8.79,49.86) ; v2(8.79,49.86) 8.36,49.43 ; v2(8.79,49.86) 9.22,50.29 ; v2(8.79,49.86) 9.22,49.43 ; 1.28,36.03 v1(1.6,35.71) ; v1(1.6,35.71) 1.92,36.03 ; v1(1.6,35.71) 1.28,35.39 ; v1(1.6,35.71) 1.92,35.39 ; J1.A38 95.91,54.66 ; J1.A38 94.74,55.83 ; J1.A38 94.74,54.66 ; J1.A38 95.91,55.83 ; v2(16.59,50.29) 17.02,49.86 ; v2(16.59,50.29) 17.02,50.72 ; v2(16.59,50.29) 16.16,49.86 ; v2(16.59,50.29) 16.16,50.72 ; 93.47,17.83 J1.B9 ; J1.B9 93.47,19 ; J1.B9 94.64,17.83 ; J1.B9 94.64,19 ; J1.3 96.22,5.16 ; J1.3 96.22,6.53 ; J1.3 93.16,6.53 ; J1.3 93.16,5.16 ; 10.98,19.33 v2(11.4,19.76) ; v2(11.4,19.76) 11.83,19.33 ; v2(11.4,19.76) 11.83,20.19 ; v2(11.4,19.76) 10.98,20.19 ; 9.98,45.7 v2(10.41,46.13) ; v2(10.41,46.13) 10.84,45.7 ; v2(10.41,46.13) 9.98,46.56 ; v2(10.41,46.13) 10.84,46.56 ; v1(9.96,20.75) 10.28,21.07 ; v1(9.96,20.75) 9.63,20.43 ; v1(9.96,20.75) 9.63,21.07 ; v1(9.96,20.75) 10.28,20.43 ; v1(98.37,31.19) 98.7,31.51 ; v1(98.37,31.19) 98.05,31.51 ; v1(98.37,31.19) 98.05,30.87 ; v1(98.37,31.19) 98.7,30.87 ; 15.98,42.19 R52.2 ; R52.2 17.09,42.19 ; R52.2 15.98,43.36 ; R52.2 17.09,43.36 ; v1(98.37,36.27) 98.7,35.95 ; v1(98.37,36.27) 98.05,35.95 ; v1(98.37,36.27) 98.7,36.59 ; v1(98.37,36.27) 98.05,36.59 ; 15.98,29.97 R51.2 ; R51.2 17.09,31.14 ; R51.2 17.09,29.97 ; R51.2 15.98,31.14 ; 98.05,48.65 v1(98.37,48.97) ; v1(98.37,48.97) 98.7,49.29 ; v1(98.37,48.97) 98.7,48.65 ; v1(98.37,48.97) 98.05,49.29 ; 2.83,35.66 R14.2 ; R14.2 3.93,34.49 ; R14.2 2.83,34.49 ; R14.2 3.93,35.66 ; 15.98,35.64 R12.2 ; R12.2 17.09,35.64 ; R12.2 15.98,34.47 ; R12.2 17.09,34.47 ; 9,38.57 v1(9.32,38.25) ; v1(9.32,38.25) 9.64,38.57 ; v1(9.32,38.25) 9,37.93 ; v1(9.32,38.25) 9.64,37.93 ; v1(83.44,9.53) 83.76,9.85 ; v1(83.44,9.53) 83.12,9.2 ; v1(83.44,9.53) 83.76,9.2 ; v1(83.44,9.53) 83.12,9.85 ; 11.84,46.26 v2(12.27,46.69) ; v2(12.27,46.69) 12.7,47.11 ; v2(12.27,46.69) 12.7,46.26 ; v2(12.27,46.69) 11.84,47.11 ; v2(4.7,12.8) 5.13,13.23 ; v2(4.7,12.8) 5.13,12.37 ; v2(4.7,12.8) 4.27,12.37 ; v2(4.7,12.8) 4.27,13.23 ; 1.78,17.6 v2(2.21,17.17) ; v2(2.21,17.17) 2.64,17.6 ; v2(2.21,17.17) 2.64,16.74 ; v2(2.21,17.17) 1.78,16.74 ; v1(98.37,21.03) 98.7,20.71 ; v1(98.37,21.03) 98.05,20.71 ; v1(98.37,21.03) 98.05,21.35 ; v1(98.37,21.03) 98.7,21.35 ; 2.83,28.15 R37.2 ; R37.2 3.93,26.97 ; R37.2 3.93,28.15 ; R37.2 2.83,26.97 ; 15.98,22.2 R11.2 ; R11.2 17.09,22.2 ; R11.2 15.98,23.37 ; R11.2 17.09,23.37 ; v1(98.37,24.84) 98.7,24.52 ; v1(98.37,24.84) 98.05,25.16 ; v1(98.37,24.84) 98.05,24.52 ; v1(98.37,24.84) 98.7,25.16 ; 98.05,26.43 v1(98.37,26.11) ; v1(98.37,26.11) 98.05,25.79 ; v1(98.37,26.11) 98.7,25.79 ; v1(98.37,26.11) 98.7,26.43 ; R13.2 3.93,23.35 ; R13.2 3.93,22.17 ; R13.2 2.83,23.35 ; R13.2 2.83,22.17 ; 98.05,30.24 v1(98.37,29.92) ; v1(98.37,29.92) 98.7,30.24 ; v1(98.37,29.92) 98.7,29.6 ; v1(98.37,29.92) 98.05,29.6 ; v1(1.6,23.01) 1.92,23.33 ; v1(1.6,23.01) 1.92,22.69 ; v1(1.6,23.01) 1.28,23.33 ; v1(1.6,23.01) 1.28,22.69 ; 94.74,40.59 J1.A26 ; J1.A26 95.91,40.59 ; J1.A26 95.91,39.42 ; J1.A26 94.74,39.42 ; v1(98.37,23.57) 98.7,23.25 ; v1(98.37,23.57) 98.7,23.89 ; v1(98.37,23.57) 98.05,23.89 ; v1(98.37,23.57) 98.05,23.25 ; R1.2 17.09,20.67 ; R1.2 17.09,21.85 ; R1.2 15.98,21.85 ; R1.2 15.98,20.67 ; 13.46,53.16 v2(13.89,52.73) ; v2(13.89,52.73) 13.46,52.3 ; v2(13.89,52.73) 14.32,53.16 ; v2(13.89,52.73) 14.32,52.3 ; 2.83,23.98 R21.2 ; R21.2 3.93,23.98 ; R21.2 3.93,25.15 ; R21.2 2.83,25.15 ; v2(3.73,52.73) 4.16,52.3 ; v2(3.73,52.73) 3.3,53.16 ; v2(3.73,52.73) 3.3,52.3 ; v2(3.73,52.73) 4.16,53.16 ; 11.88,16.57 v2(12.31,16.14) ; v2(12.31,16.14) 11.88,15.71 ; v2(12.31,16.14) 12.74,15.71 ; v2(12.31,16.14) 12.74,16.57 ; R61.2 3.93,32.67 ; R61.2 3.93,31.49 ; R61.2 2.83,32.67 ; R61.2 2.83,31.49 ; v2(17.14,12.7) 17.57,13.13 ; v2(17.14,12.7) 16.72,12.27 ; v2(17.14,12.7) 17.57,12.27 ; v2(17.14,12.7) 16.72,13.13 ; v1(98.37,57.86) 98.7,58.18 ; v1(98.37,57.86) 98.05,57.54 ; v1(98.37,57.86) 98.7,57.54 ; v1(98.37,57.86) 98.05,58.18 ; 98.05,54.37 v1(98.37,54.05) ; v1(98.37,54.05) 98.05,53.73 ; v1(98.37,54.05) 98.7,54.37 ; v1(98.37,54.05) 98.7,53.73 ; v1(98.37,28.65) 98.7,28.97 ; v1(98.37,28.65) 98.05,28.97 ; v1(98.37,28.65) 98.05,28.33 ; v1(98.37,28.65) 98.7,28.33 ; 10.95,50.24 v2(11.38,49.81) ; v2(11.38,49.81) 11.81,50.24 ; v2(11.38,49.81) 11.81,49.38 ; v2(11.38,49.81) 10.95,49.38 ; 2.83,41.73 R46.2 ; R46.2 3.93,41.73 ; R46.2 3.93,40.56 ; R46.2 2.83,40.56 ; 93.47,11.38 94.06,10.79 ; 94.06,10.79 93.47,10.21 ; 94.06,10.79 94.64,11.38 ; 94.06,10.79 94.64,10.21 ; 15.98,26.6 R27.2 ; R27.2 15.98,25.42 ; R27.2 17.09,25.42 ; R27.2 17.09,26.6 ; v1(98.37,45.16) 98.7,44.84 ; v1(98.37,45.16) 98.05,45.48 ; v1(98.37,45.16) 98.7,45.48 ; v1(98.37,45.16) 98.05,44.84 ; v2(9.75,16.08) 10.18,15.65 ; v2(9.75,16.08) 9.32,15.65 ; v2(9.75,16.08) 9.32,16.51 ; v2(9.75,16.08) 10.18,16.51 ; 15.98,40.21 R36.2 ; R36.2 15.98,39.04 ; R36.2 17.09,40.21 ; R36.2 17.09,39.04 ; v2(5.92,19.13) 6.35,19.56 ; v2(5.92,19.13) 5.49,19.56 ; v2(5.92,19.13) 5.49,18.7 ; v2(5.92,19.13) 6.35,18.7 ; 94.74,8.94 J1.A2 ; J1.A2 95.91,8.94 ; J1.A2 95.91,10.11 ; J1.A2 94.74,10.11 ; 9.25,33 v1(9.58,33.32) ; v1(9.58,33.32) 9.25,33.65 ; v1(9.58,33.32) 9.9,33.65 ; v1(9.58,33.32) 9.9,33 ; v1(98.37,56.59) 98.7,56.91 ; v1(98.37,56.59) 98.7,56.27 ; v1(98.37,56.59) 98.05,56.91 ; v1(98.37,56.59) 98.05,56.27 ; R38.2 3.93,40.24 ; R38.2 2.83,40.24 ; R38.2 3.93,39.06 ; R38.2 2.83,39.06 ; v1(98.37,13.41) 98.7,13.73 ; v1(98.37,13.41) 98.05,13.73 ; v1(98.37,13.41) 98.05,13.09 ; v1(98.37,13.41) 98.7,13.09 ; 2.83,25.47 R29.2 ; R29.2 3.93,25.47 ; R29.2 3.93,26.65 ; R29.2 2.83,26.65 ; 9.08,41.72 v1(9.4,41.4) ; v1(9.4,41.4) 9.72,41.72 ; v1(9.4,41.4) 9.72,41.08 ; v1(9.4,41.4) 9.08,41.08 ; v2(17.12,16.18) 17.55,16.61 ; v2(17.12,16.18) 17.55,15.75 ; v2(17.12,16.18) 16.69,16.61 ; v2(17.12,16.18) 16.69,15.75 ; v1(98.37,43.89) 98.7,43.57 ; v1(98.37,43.89) 98.05,43.57 ; v1(98.37,43.89) 98.05,44.21 ; v1(98.37,43.89) 98.7,44.21 ; 98.05,34.05 v1(98.37,33.73) ; v1(98.37,33.73) 98.7,33.41 ; v1(98.37,33.73) 98.05,33.41 ; v1(98.37,33.73) 98.7,34.05 ; 10.78,22.44 v1(11.1,22.76) ; v1(11.1,22.76) 11.42,22.44 ; v1(11.1,22.76) 10.78,23.08 ; v1(11.1,22.76) 11.42,23.08 ; 1.28,20.15 v1(1.6,20.47) ; v1(1.6,20.47) 1.28,20.79 ; v1(1.6,20.47) 1.92,20.15 ; v1(1.6,20.47) 1.92,20.79 ; J1.1 96.22,60.88 ; J1.1 96.22,59.51 ; J1.1 93.16,60.88 ; J1.1 93.16,59.51 ; 93.47,8.84 94.06,8.26 ; 94.06,8.26 94.64,7.67 ; 94.06,8.26 94.64,8.84 ; 94.06,8.26 93.47,7.67 ; 9,43.3 v1(9.32,42.98) ; v1(9.32,42.98) 9.64,43.3 ; v1(9.32,42.98) 9.64,42.65 ; v1(9.32,42.98) 9,42.65 ; v1(12.37,48.92) 12.69,49.24 ; v1(12.37,48.92) 12.69,48.6 ; v1(12.37,48.92) 12.05,49.24 ; v1(12.37,48.92) 12.05,48.6 ; v2(2.16,15.34) 2.59,14.91 ; v2(2.16,15.34) 2.59,15.77 ; v2(2.16,15.34) 1.73,15.77 ; v2(2.16,15.34) 1.73,14.91 ; v2(16.48,52.73) 16.91,52.3 ; v2(16.48,52.73) 16.06,52.3 ; v2(16.48,52.73) 16.06,53.16 ; v2(16.48,52.73) 16.91,53.16 ; 7.06,18.9 v2(7.49,19.33) ; v2(7.49,19.33) 7.92,18.9 ; v2(7.49,19.33) 7.92,19.76 ; v2(7.49,19.33) 7.06,19.76 ; 15.98,40.54 R44.2 ; R44.2 17.09,41.71 ; R44.2 17.09,40.54 ; R44.2 15.98,41.71 ; 98.56,5.16 J1.4 98.56,6.53 ; 98.05,38.49 v1(98.37,38.81) ; v1(98.37,38.81) 98.7,38.49 ; v1(98.37,38.81) 98.05,39.13 ; v1(98.37,38.81) 98.7,39.13 ; v2(12.52,19.08) 12.95,19.5 ; v2(12.52,19.08) 12.09,19.5 ; v2(12.52,19.08) 12.09,18.65 ; v2(12.52,19.08) 12.95,18.65 ; 15.98,29.59 R43.2 17.09,29.59 ; v2(2.13,19.05) 2.56,19.48 ; v2(2.13,19.05) 2.56,18.62 ; v2(2.13,19.05) 1.7,19.48 ; v2(2.13,19.05) 1.7,18.62 ; 98.05,50.56 v1(98.37,50.24) ; v1(98.37,50.24) 98.7,50.56 ; v1(98.37,50.24) 98.05,49.92 ; v1(98.37,50.24) 98.7,49.92 ; 98.05,15.63 v1(98.37,15.95) ; v1(98.37,15.95) 98.7,15.63 ; v1(98.37,15.95) 98.05,16.27 ; v1(98.37,15.95) 98.7,16.27 ; 2.83,37.56 R30.2 ; R30.2 2.83,38.74 ; R30.2 3.93,37.56 ; R30.2 3.93,38.74 ; 98.05,11.19 v1(98.37,10.87) ; v1(98.37,10.87) 98.7,11.19 ; v1(98.37,10.87) 98.05,10.55 ; v1(98.37,10.87) 98.7,10.55 ; v2(13.89,50.19) 14.32,50.62 ; v2(13.89,50.19) 13.46,50.62 ; v2(13.89,50.19) 13.46,49.76 ; v2(13.89,50.19) 14.32,49.76 ; v1(98.37,46.43) 98.7,46.75 ; v1(98.37,46.43) 98.7,46.11 ; v1(98.37,46.43) 98.05,46.11 ; v1(98.37,46.43) 98.05,46.75 ; v1(98.37,55.32) 98.7,55 ; v1(98.37,55.32) 98.7,55.64 ; v1(98.37,55.32) 98.05,55 ; v1(98.37,55.32) 98.05,55.64 ; R60.2 17.09,43.69 ; R60.2 17.09,44.86 ; R60.2 15.98,44.86 ; R60.2 15.98,43.69 ; 15.98,26.92 R35.2 17.09,26.92 ; 9.18,37.2 v1(9.5,36.88) ; v1(9.5,36.88) 9.82,36.56 ; v1(9.5,36.88) 9.82,37.2 ; v1(9.5,36.88) 9.18,36.56
  BOTTOM w0.152: 96.51,59.18 J1.5 ; J1.5 98.41,59.99 ; J1.5 98.14,60.81 ; J1.5 98.14,59.18 ; J1.5 97.33,61.08 ; J1.5 96.24,59.99 ; J1.5 96.51,60.81 ; J1.5 97.33,58.91 ; v1(9.32,42.98) 9.64,42.65 ; v1(9.32,42.98) 9,43.3 ; v1(9.32,42.98) 9,42.65 ; v1(9.32,42.98) 9.64,43.3 ; J1.6 97.33,7.13 ; J1.6 98.41,6.05 ; J1.6 97.33,4.96 ; J1.6 96.51,6.86 ; J1.6 98.14,5.23 ; J1.6 96.51,5.23 ; J1.6 96.24,6.05 ; J1.6 98.14,6.86 ; 1.28,20.15 v1(1.6,20.47) ; v1(1.6,20.47) 1.92,20.79 ; v1(1.6,20.47) 1.92,20.15 ; v1(1.6,20.47) 1.28,20.79 ; 98.05,11.82 v1(98.37,12.14) ; v1(98.37,12.14) 98.05,12.46 ; v1(98.37,12.14) 98.7,11.82 ; v1(98.37,12.14) 98.7,12.46 ; v1(6.05,47.9) 6.37,47.58 ; v1(6.05,47.9) 5.72,48.23 ; v1(6.05,47.9) 6.37,48.23 ; v1(6.05,47.9) 5.72,47.58 ; 12.03,40.27 U1.71 13.49,40.27 ; 9.02,44.86 v1(9.35,45.19) ; v1(9.35,45.19) 9.67,44.86 ; v1(9.35,45.19) 9.67,45.51 ; v1(9.35,45.19) 9.02,45.51 ; 1.28,21.42 v1(1.6,21.74) ; v1(1.6,21.74) 1.28,22.06 ; v1(1.6,21.74) 1.92,21.42 ; v1(1.6,21.74) 1.92,22.06 ; 2.82,32.49 R65.2 ; R65.2 3.94,32.49 ; R65.2 3.38,33.07 ; R65.2 3.38,31.9 ; v1(9.8,28.75) 10.13,28.43 ; v1(9.8,28.75) 9.48,28.43 ; v1(9.8,28.75) 9.48,29.08 ; v1(9.8,28.75) 10.13,29.08 ; v1(1.6,23.01) 1.92,22.69 ; v1(1.6,23.01) 1.92,23.33 ; v1(1.6,23.01) 1.28,23.33 ; v1(1.6,23.01) 1.28,22.69 ; v1(98.37,51.51) 98.7,51.19 ; v1(98.37,51.51) 98.05,51.19 ; v1(98.37,51.51) 98.05,51.83 ; v1(98.37,51.51) 98.7,51.83 ; 14.43,15.78 v2(14.86,16.21) ; v2(14.86,16.21) 15.29,15.78 ; v2(14.86,16.21) 15.29,16.63 ; v2(14.86,16.21) 14.43,16.63 ; TP6.1 99.6,62.68 ; TP6.1 97.94,63.4 ; TP6.1 98.17,64.11 ; TP6.1 99.6,64.11 ; TP6.1 98.88,64.34 ; TP6.1 98.17,62.68 ; TP6.1 99.82,63.4 ; TP6.1 98.88,62.46 ; 91.36,63.3 TP1.1 ; TP1.1 93.25,63.3 ; TP1.1 92.3,64.24 ; TP1.1 92.3,62.35 ; TP1.1 91.59,64.01 ; TP1.1 91.59,62.58 ; TP1.1 93.02,62.58 ; TP1.1 93.02,64.01 ; v1(10.79,33.43) 11.12,33.75 ; v1(10.79,33.43) 11.12,33.1 ; v1(10.79,33.43) 10.47,33.75 ; v1(10.79,33.43) 10.47,33.1 ; v1(7.49,46.38) 7.82,46.7 ; v1(7.49,46.38) 7.17,46.7 ; v1(7.49,46.38) 7.17,46.06 ; v1(7.49,46.38) 7.82,46.06 ; 10.95,49.38 v2(11.38,49.81) ; v2(11.38,49.81) 11.81,50.24 ; v2(11.38,49.81) 10.95,50.24 ; v2(11.38,49.81) 11.81,49.38 ; 3.3,49.76 v2(3.73,50.19) ; v2(3.73,50.19) 4.16,50.62 ; v2(3.73,50.19) 3.3,50.62 ; v2(3.73,50.19) 4.16,49.76 ; 3.71,19.48 v2(4.14,19.05) ; v2(4.14,19.05) 4.57,18.62 ; v2(4.14,19.05) 3.71,18.62 ; v2(4.14,19.05) 4.57,19.48 ; 98.05,32.14 v1(98.37,32.46) ; v1(98.37,32.46) 98.7,32.78 ; v1(98.37,32.46) 98.7,32.14 ; v1(98.37,32.46) 98.05,32.78 ; 83.12,9.2 v1(83.44,9.53) ; v1(83.44,9.53) 83.76,9.2 ; v1(83.44,9.53) 83.12,9.85 ; v1(83.44,9.53) 83.76,9.85 ; R47.2 16.54,30.1 ; R47.2 17.1,29.51 ; R47.2 16.54,28.93 ; R47.2 15.97,29.51 ; 98.05,35.32 v1(98.37,35) ; v1(98.37,35) 98.05,34.68 ; v1(98.37,35) 98.7,35.32 ; v1(98.37,35) 98.7,34.68 ; v1(98.37,43.89) 98.7,43.57 ; v1(98.37,43.89) 98.7,44.21 ; v1(98.37,43.89) 98.05,43.57 ; v1(98.37,43.89) 98.05,44.21 ; 98.05,44.84 v1(98.37,45.16) ; v1(98.37,45.16) 98.7,44.84 ; v1(98.37,45.16) 98.05,45.48 ; v1(98.37,45.16) 98.7,45.48 ; R56.2 16.54,43.84 ; R56.2 16.54,42.67 ; R56.2 17.1,43.26 ; R56.2 15.97,43.26 ; 16.16,50.72 v2(16.59,50.29) ; v2(16.59,50.29) 16.16,49.86 ; v2(16.59,50.29) 17.02,49.86 ; v2(16.59,50.29) 17.02,50.72 ; 98.05,52.46 v1(98.37,52.78) ; v1(98.37,52.78) 98.7,53.1 ; v1(98.37,52.78) 98.7,52.46 ; v1(98.37,52.78) 98.05,53.1 ; 98.05,41.03 v1(98.37,41.35) ; v1(98.37,41.35) 98.7,41.03 ; v1(98.37,41.35) 98.05,41.67 ; v1(98.37,41.35) 98.7,41.67 ; TP5.1 15.96,54.53 ; TP5.1 14.52,55.96 ; TP5.1 15.96,55.96 ; TP5.1 14.52,54.53 ; R16.2 17.1,35.56 ; R16.2 16.54,34.97 ; R16.2 15.97,35.56 ; R16.2 16.54,36.15 ; 9.32,16.51 v2(9.75,16.08) ; v2(9.75,16.08) 9.32,15.65 ; v2(9.75,16.08) 10.18,15.65 ; v2(9.75,16.08) 10.18,16.51 ; M2.1 11.92,10.94 ; M2.1 8.4,14.46 ; M2.1 8.4,10.94 ; M2.1 11.92,14.46 ; v1(98.37,33.73) 98.7,33.41 ; v1(98.37,33.73) 98.05,33.41 ; v1(98.37,33.73) 98.05,34.05 ; v1(98.37,33.73) 98.7,34.05 ; v1(1.6,39.52) 1.92,39.2 ; v1(1.6,39.52) 1.28,39.2 ; v1(1.6,39.52) 1.92,39.84 ; v1(1.6,39.52) 1.28,39.84 ; R8.2 16.54,22.35 ; R8.2 17.1,21.77 ; R8.2 16.54,21.18 ; R8.2 15.97,21.77 ; 15.97,37.13 R24.2 ; R24.2 16.54,37.72 ; R24.2 17.1,37.13 ; R24.2 16.54,36.55 ; v1(1.6,33.17) 1.92,32.85 ; v1(1.6,33.17) 1.92,33.49 ; v1(1.6,33.17) 1.28,33.49 ; v1(1.6,33.17) 1.28,32.85 ; 2.82,33.99 R10.2 ; R10.2 3.94,33.99 ; R10.2 3.38,33.4 ; R10.2 3.38,34.57 ; 15.97,38.63 R32.2 ; R32.2 16.54,39.22 ; R32.2 17.1,38.63 ; R32.2 16.54,38.05 ; v1(1.6,44.6) 1.92,44.92 ; v1(1.6,44.6) 1.92,44.28 ; v1(1.6,44.6) 1.28,44.28 ; v1(1.6,44.6) 1.28,44.92 ; v1(98.37,13.41) 98.7,13.73 ; v1(98.37,13.41) 98.05,13.73 ; v1(98.37,13.41) 98.7,13.09 ; v1(98.37,13.41) 98.05,13.09 ; 11.63,24.02 U1.11 13.49,24.02 ; v1(10.79,24.74) 11.12,25.06 ; v1(10.79,24.74) 10.47,24.42 ; v1(10.79,24.74) 10.47,25.06 ; v1(10.79,24.74) 11.12,24.42 ; 12.09,19.5 v2(12.52,19.08) ; v2(12.52,19.08) 12.09,18.65 ; v2(12.52,19.08) 12.95,19.5 ; v2(12.52,19.08) 12.95,18.65 ; v2(2.21,17.17) 2.64,17.6 ; v2(2.21,17.17) 2.64,16.74 ; v2(2.21,17.17) 1.78,16.74 ; v2(2.21,17.17) 1.78,17.6 ; v1(98.37,29.92) 98.7,29.6 ; v1(98.37,29.92) 98.05,30.24 ; v1(98.37,29.92) 98.05,29.6 ; v1(98.37,29.92) 98.7,30.24 ; 1.28,25.23 v1(1.6,25.55) ; v1(1.6,25.55) 1.28,25.87 ; v1(1.6,25.55) 1.92,25.23 ; v1(1.6,25.55) 1.92,25.87 ; 99.16,1.93 TP8.1 ; TP8.1 98.22,2.87 ; TP8.1 99.88,2.15 ; TP8.1 98.45,2.15 ; TP8.1 99.16,3.81 ; TP8.1 100.1,2.87 ; TP8.1 99.88,3.59 ; TP8.1 98.45,3.59 ; v1(1.6,42.06) 1.92,41.74 ; v1(1.6,42.06) 1.28,42.38 ; v1(1.6,42.06) 1.28,41.74 ; v1(1.6,42.06) 1.92,42.38 ; v2(8.79,49.86) 9.22,49.43 ; v2(8.79,49.86) 9.22,50.29 ; v2(8.79,49.86) 8.36,49.43 ; v2(8.79,49.86) 8.36,50.29 ; 86.82,7.96 v1(87.15,8.28) ; v1(87.15,8.28) 86.82,8.6 ; v1(87.15,8.28) 87.47,8.6 ; v1(87.15,8.28) 87.47,7.96 ; 9.3,40.1 v1(9.63,39.78) ; v1(9.63,39.78) 9.3,39.45 ; v1(9.63,39.78) 9.95,40.1 ; v1(9.63,39.78) 9.95,39.45 ; 7.24,47.88 v2(7.67,48.31) ; v2(7.67,48.31) 7.24,48.74 ; v2(7.67,48.31) 8.1,48.74 ; v2(7.67,48.31) 8.1,47.88 ; 2.82,35.48 R18.2 ; R18.2 3.38,34.9 ; R18.2 3.38,36.07 ; R18.2 3.94,35.48 ; v1(98.37,47.7) 98.7,47.38 ; v1(98.37,47.7) 98.05,48.02 ; v1(98.37,47.7) 98.7,48.02 ; v1(98.37,47.7) 98.05,47.38 ; 2.82,28.07 R41.2 ; R41.2 3.38,28.65 ; R41.2 3.94,28.07 ; R41.2 3.38,27.48 ; 98.7,7.67 R7.1 ; R7.1 99.27,8.26 ; R7.1 98.15,7.67 ; R7.1 99.26,8.84 ; R7.1 99.26,7.67 ; R7.1 98.15,8.84 ; R7.1 98.14,8.26 ; R7.1 98.7,8.84 ; M1.1 11.92,55.1 ; M1.1 11.92,51.58 ; M1.1 8.4,55.1 ; M1.1 8.4,51.58 ; 2.82,23.42 R17.2 ; R17.2 3.38,22.83 ; R17.2 3.94,23.42 ; R17.2 3.38,24.01 ; 3.38,28.98 R49.2 ; R49.2 3.94,29.57 ; R49.2 2.82,29.57 ; R49.2 3.38,30.15 ; v1(98.37,28.65) 98.7,28.97 ; v1(98.37,28.65) 98.7,28.33 ; v1(98.37,28.65) 98.05,28.97 ; v1(98.37,28.65) 98.05,28.33 ; 9.18,37.2 v1(9.5,36.88) ; v1(9.5,36.88) 9.82,37.2 ; v1(9.5,36.88) 9.18,36.56 ; v1(9.5,36.88) 9.82,36.56 ; TP4.1 5.8,55.96 ; TP4.1 5.8,54.53 ; TP4.1 4.36,54.53 ; TP4.1 4.36,55.96 ; v1(1.6,26.82) 1.92,27.14 ; v1(1.6,26.82) 1.28,27.14 ; v1(1.6,26.82) 1.28,26.5 ; v1(1.6,26.82) 1.92,26.5 ; 86.36,2.66 M4.1 ; M4.1 88.12,3.32 ; M4.1 84.6,3.32 ; M4.1 84.6,6.84 ; M4.1 88.12,6.84 ; M4.1 88.78,5.08 ; M4.1 83.94,5.08 ; M4.1 86.36,7.5 ; 10.22,44.41 v1(10.54,44.73) ; v1(10.54,44.73) 10.22,45.05 ; v1(10.54,44.73) 10.86,44.41 ; v1(10.54,44.73) 10.86,45.05 ; v1(11.1,22.76) 11.42,23.08 ; v1(11.1,22.76) 10.78,23.08 ; v1(11.1,22.76) 11.42,22.44 ; v1(11.1,22.76) 10.78,22.44 ; 16.72,13.13 v2(17.14,12.7) ; v2(17.14,12.7) 17.57,12.27 ; v2(17.14,12.7) 16.72,12.27 ; v2(17.14,12.7) 17.57,13.13 ; 10.47,36.56 v1(10.79,36.88) ; v1(10.79,36.88) 11.12,36.56 ; v1(10.79,36.88) 10.47,37.2 ; v1(10.79,36.88) 11.12,37.2 ; 7.14,18.34 v2(7.57,17.91) ; v2(7.57,17.91) 8,18.34 ; v2(7.57,17.91) 8,17.48 ; v2(7.57,17.91) 7.14,17.48 ; v2(13.89,50.19) 14.32,50.62 ; v2(13.89,50.19) 14.32,49.76 ; v2(13.89,50.19) 13.46,49.76 ; v2(13.89,50.19) 13.46,50.62 ; v1(98.37,36.27) 98.7,36.59 ; v1(98.37,36.27) 98.05,35.95 ; v1(98.37,36.27) 98.7,35.95 ; v1(98.37,36.27) 98.05,36.59 ; 1.28,32.22 v1(1.6,31.9) ; v1(1.6,31.9) 1.28,31.58 ; v1(1.6,31.9) 1.92,32.22 ; v1(1.6,31.9) 1.92,31.58 ; 9.2,25.04 v1(9.53,24.71) ; v1(9.53,24.71) 9.85,24.39 ; v1(9.53,24.71) 9.2,24.39 ; v1(9.53,24.71) 9.85,25.04 ; 93.24,2.03 TP7.1 ; TP7.1 94.67,3.46 ; TP7.1 93.24,3.46 ; TP7.1 93.95,3.69 ; TP7.1 93.01,2.74 ; TP7.1 93.95,1.8 ; TP7.1 94.9,2.74 ; TP7.1 94.67,2.03 ; 12.03,28.27 U1.27 13.49,28.27 ; 3.71,47.4 v2(4.14,47.83) ; v2(4.14,47.83) 3.71,48.26 ; v2(4.14,47.83) 4.57,47.4 ; v2(4.14,47.83) 4.57,48.26 ; v1(10.79,41.35) 11.12,41.67 ; v1(10.79,41.35) 10.47,41.67 ; v1(10.79,41.35) 11.12,41.03 ; v1(10.79,41.35) 10.47,41.03 ; v2(7.49,19.33) 7.92,18.9 ; v2(7.49,19.33) 7.92,19.76 ; v2(7.49,19.33) 7.06,19.76 ; v2(7.49,19.33) 7.06,18.9 ; 2.09,47.95 v2(2.51,47.52) ; v2(2.51,47.52) 2.94,47.09 ; v2(2.51,47.52) 2.94,47.95 ; v2(2.51,47.52) 2.09,47.09 ; v2(6.93,15.83) 7.36,15.4 ; v2(6.93,15.83) 6.5,15.4 ; v2(6.93,15.83) 6.5,16.26 ; v2(6.93,15.83) 7.36,16.26 ; 16.06,53.16 v2(16.48,52.73) ; v2(16.48,52.73) 16.91,52.3 ; v2(16.48,52.73) 16.06,52.3 ; v2(16.48,52.73) 16.91,53.16 ; 13.46,52.3 v2(13.89,52.73) ; v2(13.89,52.73) 14.32,53.16 ; v2(13.89,52.73) 14.32,52.3 ; v2(13.89,52.73) 13.46,53.16 ; 12.03,22.27 U1.5 13.49,22.27 ; v1(98.37,22.3) 98.7,22.62 ; v1(98.37,22.3) 98.05,22.62 ; v1(98.37,22.3) 98.05,21.98 ; v1(98.37,22.3) 98.7,21.98 ; 1.73,15.77 v2(2.16,15.34) ; v2(2.16,15.34) 2.59,15.77 ; v2(2.16,15.34) 2.59,14.91 ; v2(2.16,15.34) 1.73,14.91 ; 98.05,58.18 v1(98.37,57.86) ; v1(98.37,57.86) 98.7,58.18 ; v1(98.37,57.86) 98.05,57.54 ; v1(98.37,57.86) 98.7,57.54 ; R9.2 3.38,22.38 ; R9.2 3.94,21.79 ; R9.2 2.82,21.79 ; R9.2 3.38,21.21 ; 14.52,11.51 TP3.1 ; TP3.1 15.96,11.51 ; TP3.1 15.96,10.08 ; TP3.1 14.52,10.08 ; 1.28,34.76 v1(1.6,34.44) ; v1(1.6,34.44) 1.92,34.76 ; v1(1.6,34.44) 1.28,34.12 ; v1(1.6,34.44) 1.92,34.12 ; 1.28,43.65 v1(1.6,43.33) ; v1(1.6,43.33) 1.92,43.01 ; v1(1.6,43.33) 1.92,43.65 ; v1(1.6,43.33) 1.28,43.01 ; R50.2 3.94,41.55 ; R50.2 3.38,42.14 ; R50.2 3.38,40.97 ; R50.2 2.82,41.55 ; 98.05,14.36 v1(98.37,14.68) ; v1(98.37,14.68) 98.7,14.36 ; v1(98.37,14.68) 98.05,15 ; v1(98.37,14.68) 98.7,15 ; v2(4.52,17.2) 4.95,16.77 ; v2(4.52,17.2) 4.09,17.63 ; v2(4.52,17.2) 4.09,16.77 ; v2(4.52,17.2) 4.95,17.63 ; v2(2.13,19.05) 2.56,18.62 ; v2(2.13,19.05) 1.7,19.48 ; v2(2.13,19.05) 2.56,19.48 ; v2(2.13,19.05) 1.7,18.62 ; 85.96,9.87 v1(86.28,9.55) ; v1(86.28,9.55) 85.96,9.23 ; v1(86.28,9.55) 86.61,9.23 ; v1(86.28,9.55) 86.61,9.87 ; 98.05,25.79 v1(98.37,26.11) ; v1(98.37,26.11) 98.7,26.43 ; v1(98.37,26.11) 98.05,26.43 ; v1(98.37,26.11) 98.7,25.79 ; 10.04,37.93 v1(10.36,38.25) ; v1(10.36,38.25) 10.69,37.93 ; v1(10.36,38.25) 10.04,38.57 ; v1(10.36,38.25) 10.69,38.57 ; 98.05,27.7 v1(98.37,27.38) ; v1(98.37,27.38) 98.7,27.7 ; v1(98.37,27.38) 98.05,27.06 ; v1(98.37,27.38) 98.7,27.06 ; 1.28,40.47 v1(1.6,40.79) ; v1(1.6,40.79) 1.92,41.11 ; v1(1.6,40.79) 1.28,41.11 ; v1(1.6,40.79) 1.92,40.47 ; 9.63,21.07 v1(9.96,20.75) ; v1(9.96,20.75) 9.63,20.43 ; v1(9.96,20.75) 10.28,20.43 ; v1(9.96,20.75) 10.28,21.07 ; 98.05,20.08 v1(98.37,19.76) ; v1(98.37,19.76) 98.05,19.44 ; v1(98.37,19.76) 98.7,20.08 ; v1(98.37,19.76) 98.7,19.44 ; 6.83,31.77 U1.40 8.29,31.77 ; M3.1 86.36,63.38 ; M3.1 83.94,60.96 ; M3.1 84.6,62.72 ; M3.1 84.6,59.2 ; M3.1 88.78,60.96 ; M3.1 88.12,59.2 ; M3.1 86.36,58.54 ; M3.1 88.12,62.72 ; 11.63,36.02 U1.55 13.49,36.02 ; 6.83,34.27 U1.50 8.29,34.27 ; v2(6.27,50.19) 6.7,49.76 ; v2(6.27,50.19) 5.84,49.76 ; v2(6.27,50.19) 5.84,50.62 ; v2(6.27,50.19) 6.7,50.62 ; 98.05,50.56 v1(98.37,50.24) ; v1(98.37,50.24) 98.7,49.92 ; v1(98.37,50.24) 98.7,50.56 ; v1(98.37,50.24) 98.05,49.92 ; 98.05,18.81 v1(98.37,18.49) ; v1(98.37,18.49) 98.7,18.17 ; v1(98.37,18.49) 98.05,18.17 ; v1(98.37,18.49) 98.7,18.81 ; 5.42,46.35 v1(5.74,46.02) ; v1(5.74,46.02) 5.42,45.7 ; v1(5.74,46.02) 6.06,46.35 ; v1(5.74,46.02) 6.06,45.7 ; 4.27,15.77 v2(4.7,15.34) ; v2(4.7,15.34) 4.27,14.91 ; v2(4.7,15.34) 5.13,15.77 ; v2(4.7,15.34) 5.13,14.91 ; 9,38.57 v1(9.32,38.25) ; v1(9.32,38.25) 9,37.93 ; v1(9.32,38.25) 9.64,38.57 ; v1(9.32,38.25) 9.64,37.93 ; R63.2 17.1,32.56 ; R63.2 15.97,32.56 ; R63.2 16.54,31.98 ; R63.2 16.54,33.15 ; v1(10.74,39.78) 11.07,40.1 ; v1(10.74,39.78) 11.07,39.45 ; v1(10.74,39.78) 10.42,39.45 ; v1(10.74,39.78) 10.42,40.1 ; 8.69,30.02 U1.34 6.83,30.02 ; R55.2 16.54,31.65 ; R55.2 17.1,31.06 ; R55.2 16.54,30.48 ; R55.2 15.97,31.06 ; 84.56,9.8 v1(84.89,9.47) ; v1(84.89,9.47) 85.21,9.8 ; v1(84.89,9.47) 84.56,9.15 ; v1(84.89,9.47) 85.21,9.15 ; 12.03,31.77 U1.39 13.49,31.77 ; v1(9.4,41.4) 9.72,41.72 ; v1(9.4,41.4) 9.72,41.08 ; v1(9.4,41.4) 9.08,41.08 ; v1(9.4,41.4) 9.08,41.72 ; 10.16,46.99 U1.B2 ; U1.B2 8.43,47.97 ; U1.B2 10.16,48.95 ; U1.B2 11.89,47.97 ; U1.B1 10.16,19.05 ; U1.B1 11.89,18.07 ; U1.B1 8.43,18.07 ; U1.B1 10.16,17.09 ; 98.05,39.76 v1(98.37,40.08) ; v1(98.37,40.08) 98.05,40.4 ; v1(98.37,40.08) 98.7,40.4 ; v1(98.37,40.08) 98.7,39.76 ; v1(1.6,36.98) 1.92,36.66 ; v1(1.6,36.98) 1.28,36.66 ; v1(1.6,36.98) 1.92,37.3 ; v1(1.6,36.98) 1.28,37.3 ; v1(98.37,46.43) 98.7,46.11 ; v1(98.37,46.43) 98.7,46.75 ; v1(98.37,46.43) 98.05,46.75 ; v1(98.37,46.43) 98.05,46.11 ; 12.03,34.27 U1.49 13.49,34.27 ; R48.2 16.54,42.22 ; R48.2 16.54,41.04 ; R48.2 17.1,41.63 ; R48.2 15.97,41.63 ; 3.38,36.47 R26.2 ; R26.2 2.82,37.06 ; R26.2 3.38,37.65 ; R26.2 3.94,37.06 ; 4.27,12.37 v2(4.7,12.8) ; v2(4.7,12.8) 5.13,13.23 ; v2(4.7,12.8) 5.13,12.37 ; v2(4.7,12.8) 4.27,13.23 ; 5.79,17.68 v2(6.22,17.25) ; v2(6.22,17.25) 6.65,17.68 ; v2(6.22,17.25) 5.79,16.82 ; v2(6.22,17.25) 6.65,16.82 ; 98.05,42.3 v1(98.37,42.62) ; v1(98.37,42.62) 98.7,42.94 ; v1(98.37,42.62) 98.7,42.3 ; v1(98.37,42.62) 98.05,42.94 ; v2(5.92,19.13) 6.35,18.7 ; v2(5.92,19.13) 5.49,18.7 ; v2(5.92,19.13) 5.49,19.56 ; v2(5.92,19.13) 6.35,19.56 ; 5.84,53.16 v2(6.27,52.73) ; v2(6.27,52.73) 5.84,52.3 ; v2(6.27,52.73) 6.7,53.16 ; v2(6.27,52.73) 6.7,52.3 ; 6.83,43.77 U1.84 8.29,43.77 ; 3.38,37.97 R34.2 ; R34.2 3.94,38.56 ; R34.2 3.38,39.14 ; R34.2 2.82,38.56 ; 98.05,11.19 v1(98.37,10.87) ; v1(98.37,10.87) 98.05,10.55 ; v1(98.37,10.87) 98.7,10.55 ; v1(98.37,10.87) 98.7,11.19 ; 12.03,43.77 U1.83 13.49,43.77 ; 98.05,21.35 v1(98.37,21.03) ; v1(98.37,21.03) 98.05,20.71 ; v1(98.37,21.03) 98.7,21.35 ; v1(98.37,21.03) 98.7,20.71 ; 15.97,25.02 R23.2 ; R23.2 17.1,25.02 ; R23.2 16.54,24.43 ; R23.2 16.54,25.61 ; v1(9.5,22.76) 9.82,23.08 ; v1(9.5,22.76) 9.18,22.44 ; v1(9.5,22.76) 9.18,23.08 ; v1(9.5,22.76) 9.82,22.44 ; v1(9.5,35.79) 9.82,36.11 ; v1(9.5,35.79) 9.18,36.11 ; v1(9.5,35.79) 9.82,35.47 ; v1(9.5,35.79) 9.18,35.47 ; v1(9.58,33.32) 9.9,33.65 ; v1(9.58,33.32) 9.9,33 ; v1(9.58,33.32) 9.25,33 ; v1(9.58,33.32) 9.25,33.65 ; 13.49,25.77 U1.17 12.03,25.77 ; 6.83,36.02 U1.56 8.69,36.02 ; 15.97,34.06 R2.2 ; R2.2 16.54,33.47 ; R2.2 17.1,34.06 ; R2.2 16.54,34.65 ; 16.54,22.68 R15.2 ; R15.2 15.97,23.27 ; R15.2 16.54,23.85 ; R15.2 17.1,23.27 ; 3.38,42.47 R58.2 ; R58.2 3.94,43.05 ; R58.2 3.38,43.64 ; R58.2 2.82,43.05 ; 2.82,40.06 R42.2 ; R42.2 3.38,39.47 ; R42.2 3.94,40.06 ; R42.2 3.38,40.64 ; 12.05,49.24 v1(12.37,48.92) ; v1(12.37,48.92) 12.69,49.24 ; v1(12.37,48.92) 12.05,48.6 ; v1(12.37,48.92) 12.69,48.6 ; R57.2 3.94,31.09 ; R57.2 3.38,30.5 ; R57.2 3.38,31.68 ; R57.2 2.82,31.09 ; v1(1.6,29.36) 1.92,29.04 ; v1(1.6,29.36) 1.28,29.68 ; v1(1.6,29.36) 1.28,29.04 ; v1(1.6,29.36) 1.92,29.68 ; v1(98.37,23.57) 98.7,23.25 ; v1(98.37,23.57) 98.7,23.89 ; v1(98.37,23.57) 98.05,23.89 ; v1(98.37,23.57) 98.05,23.25 ; v1(1.6,30.63) 1.92,30.31 ; v1(1.6,30.63) 1.92,30.95 ; v1(1.6,30.63) 1.28,30.31 ; v1(1.6,30.63) 1.28,30.95 ; v1(98.37,31.19) 98.7,30.87 ; v1(98.37,31.19) 98.7,31.51 ; v1(98.37,31.19) 98.05,30.87 ; v1(98.37,31.19) 98.05,31.51 ; v1(98.37,15.95) 98.7,15.63 ; v1(98.37,15.95) 98.05,15.63 ; v1(98.37,15.95) 98.05,16.27 ; v1(98.37,15.95) 98.7,16.27 ; 2.82,44.55 R66.2 ; R66.2 3.38,45.14 ; R66.2 3.94,44.55 ; R66.2 3.38,43.96 ; 11.88,15.71 v2(12.31,16.14) ; v2(12.31,16.14) 12.74,16.57 ; v2(12.31,16.14) 12.74,15.71 ; v2(12.31,16.14) 11.88,16.57 ; 8.29,25.77 U1.18 6.83,25.77 ; 6.83,22.27 U1.6 8.29,22.27 ; 98.05,49.29 v1(98.37,48.97) ; v1(98.37,48.97) 98.7,48.65 ; v1(98.37,48.97) 98.7,49.29 ; v1(98.37,48.97) 98.05,48.65 ; 98.05,37.86 v1(98.37,37.54) ; v1(98.37,37.54) 98.05,37.22 ; v1(98.37,37.54) 98.7,37.86 ; v1(98.37,37.54) 98.7,37.22 ; v1(98.37,24.84) 98.7,25.16 ; v1(98.37,24.84) 98.7,24.52 ; v1(98.37,24.84) 98.05,25.16 ; v1(98.37,24.84) 98.05,24.52 ; v1(83.41,7.92) 83.74,7.6 ; v1(83.41,7.92) 83.09,8.25 ; v1(83.41,7.92) 83.74,8.25 ; v1(83.41,7.92) 83.09,7.6 ; 98.05,17.54 v1(98.37,17.22) ; v1(98.37,17.22) 98.05,16.9 ; v1(98.37,17.22) 98.7,16.9 ; v1(98.37,17.22) 98.7,17.54 ; v2(17.12,16.18) 17.55,16.61 ; v2(17.12,16.18) 16.69,16.61 ; v2(17.12,16.18) 16.69,15.75 ; v2(17.12,16.18) 17.55,15.75 ; v2(10.41,46.13) 10.84,45.7 ; v2(10.41,46.13) 9.98,46.56 ; v2(10.41,46.13) 9.98,45.7 ; v2(10.41,46.13) 10.84,46.56 ; v1(10.59,42.93) 10.91,42.6 ; v1(10.59,42.93) 10.27,43.25 ; v1(10.59,42.93) 10.91,43.25 ; v1(10.59,42.93) 10.27,42.6 ; R40.2 16.54,40.72 ; R40.2 16.54,39.55 ; R40.2 17.1,40.13 ; R40.2 15.97,40.13 ; R33.2 3.38,27.16 ; R33.2 2.82,26.57 ; R33.2 3.94,26.57 ; R33.2 3.38,25.98 ; R39.2 17.1,28.02 ; R39.2 16.54,28.6 ; R39.2 16.54,27.43 ; R39.2 15.97,28.02 ; v1(98.37,55.32) 98.7,55 ; v1(98.37,55.32) 98.05,55.64 ; v1(98.37,55.32) 98.05,55 ; v1(98.37,55.32) 98.7,55.64 ; v1(10.74,28.75) 11.07,29.08 ; v1(10.74,28.75) 11.07,28.43 ; v1(10.74,28.75) 10.42,28.43 ; v1(10.74,28.75) 10.42,29.08 ; v1(98.37,56.59) 98.7,56.27 ; v1(98.37,56.59) 98.05,56.27 ; v1(98.37,56.59) 98.05,56.91 ; v1(98.37,56.59) 98.7,56.91 ; v1(8.28,20.12) 8.6,19.79 ; v1(8.28,20.12) 8.6,20.44 ; v1(8.28,20.12) 7.96,20.44 ; v1(8.28,20.12) 7.96,19.79 ; 98.05,53.73 v1(98.37,54.05) ; v1(98.37,54.05) 98.7,54.37 ; v1(98.37,54.05) 98.05,54.37 ; v1(98.37,54.05) 98.7,53.73 ; v1(1.6,38.25) 1.92,37.93 ; v1(1.6,38.25) 1.28,37.93 ; v1(1.6,38.25) 1.92,38.57 ; v1(1.6,38.25) 1.28,38.57 ; 11.63,30.02 U1.33 13.49,30.02 ; 1.28,28.41 v1(1.6,28.09) ; v1(1.6,28.09) 1.92,27.77 ; v1(1.6,28.09) 1.92,28.41 ; v1(1.6,28.09) 1.28,27.77 ; TP2.1 5.8,11.51 ; TP2.1 4.36,10.08 ; TP2.1 5.8,10.08 ; TP2.1 4.36,11.51 ; v2(11.4,19.76) 11.83,20.19 ; v2(11.4,19.76) 10.98,20.19 ; v2(11.4,19.76) 10.98,19.33 ; v2(11.4,19.76) 11.83,19.33 ; R64.2 17.1,44.78 ; R64.2 16.54,45.37 ; R64.2 15.97,44.78 ; R64.2 16.54,44.19 ; 3.3,52.3 v2(3.73,52.73) ; v2(3.73,52.73) 4.16,53.16 ; v2(3.73,52.73) 4.16,52.3 ; v2(3.73,52.73) 3.3,53.16 ; 1.28,24.6 v1(1.6,24.28) ; v1(1.6,24.28) 1.92,23.96 ; v1(1.6,24.28) 1.92,24.6 ; v1(1.6,24.28) 1.28,23.96 ; 2.82,25.07 R25.2 ; R25.2 3.94,25.07 ; R25.2 3.38,24.48 ; R25.2 3.38,25.66 ; 11.63,42.02 U1.77 13.49,42.02 ; 12.03,37.77 U1.61 13.49,37.77 ; 16.54,25.93 R31.2 ; R31.2 16.54,27.1 ; R31.2 17.1,26.52 ; R31.2 15.97,26.52 ; v1(1.6,35.71) 1.92,35.39 ; v1(1.6,35.71) 1.92,36.03 ; v1(1.6,35.71) 1.28,35.39 ; v1(1.6,35.71) 1.28,36.03 ; 1.73,12.37 v2(2.16,12.8) ; v2(2.16,12.8) 2.59,12.37 ; v2(2.16,12.8) 1.73,13.23 ; v2(2.16,12.8) 2.59,13.23 ; 6.83,24.02 U1.12 8.69,24.02 ; 8.29,40.27 U1.72 6.83,40.27 ; v2(12.27,46.69) 12.7,46.26 ; v2(12.27,46.69) 11.84,46.26 ; v2(12.27,46.69) 12.7,47.11 ; v1(98.37,38.81) 98.7,39.13 ; v1(98.37,38.81) 98.7,38.49 ; v1(98.37,38.81) 98.05,38.49 ; v1(98.37,38.81) 98.05,39.13 ; v2(14.88,13.16) 15.31,12.73 ; v2(14.88,13.16) 14.46,12.73 ; v2(14.88,13.16) 14.46,13.59 ; v2(14.88,13.16) 15.31,13.59 ; 8.29,28.27 U1.28 6.83,28.27 ; 6.83,37.77 U1.62 8.29,37.77 ; 6.83,42.02 U1.78 8.69,42.02
